# Altium PCB SS_MB_CONV2.0.PcbDoc (part 1 of 4)
Units mil, origin at the board's own origin, x right, y up, seen from the top; angles counter-clockwise.
Board outline 5818.45 x 4760.12 mil, 4 copper layers (Top Layer, Internal Plane 1, Internal Plane 2, Bottom Layer), stack 30.634 mil thick; 381 components, 398 nets, 1514 pads, 801 vias.
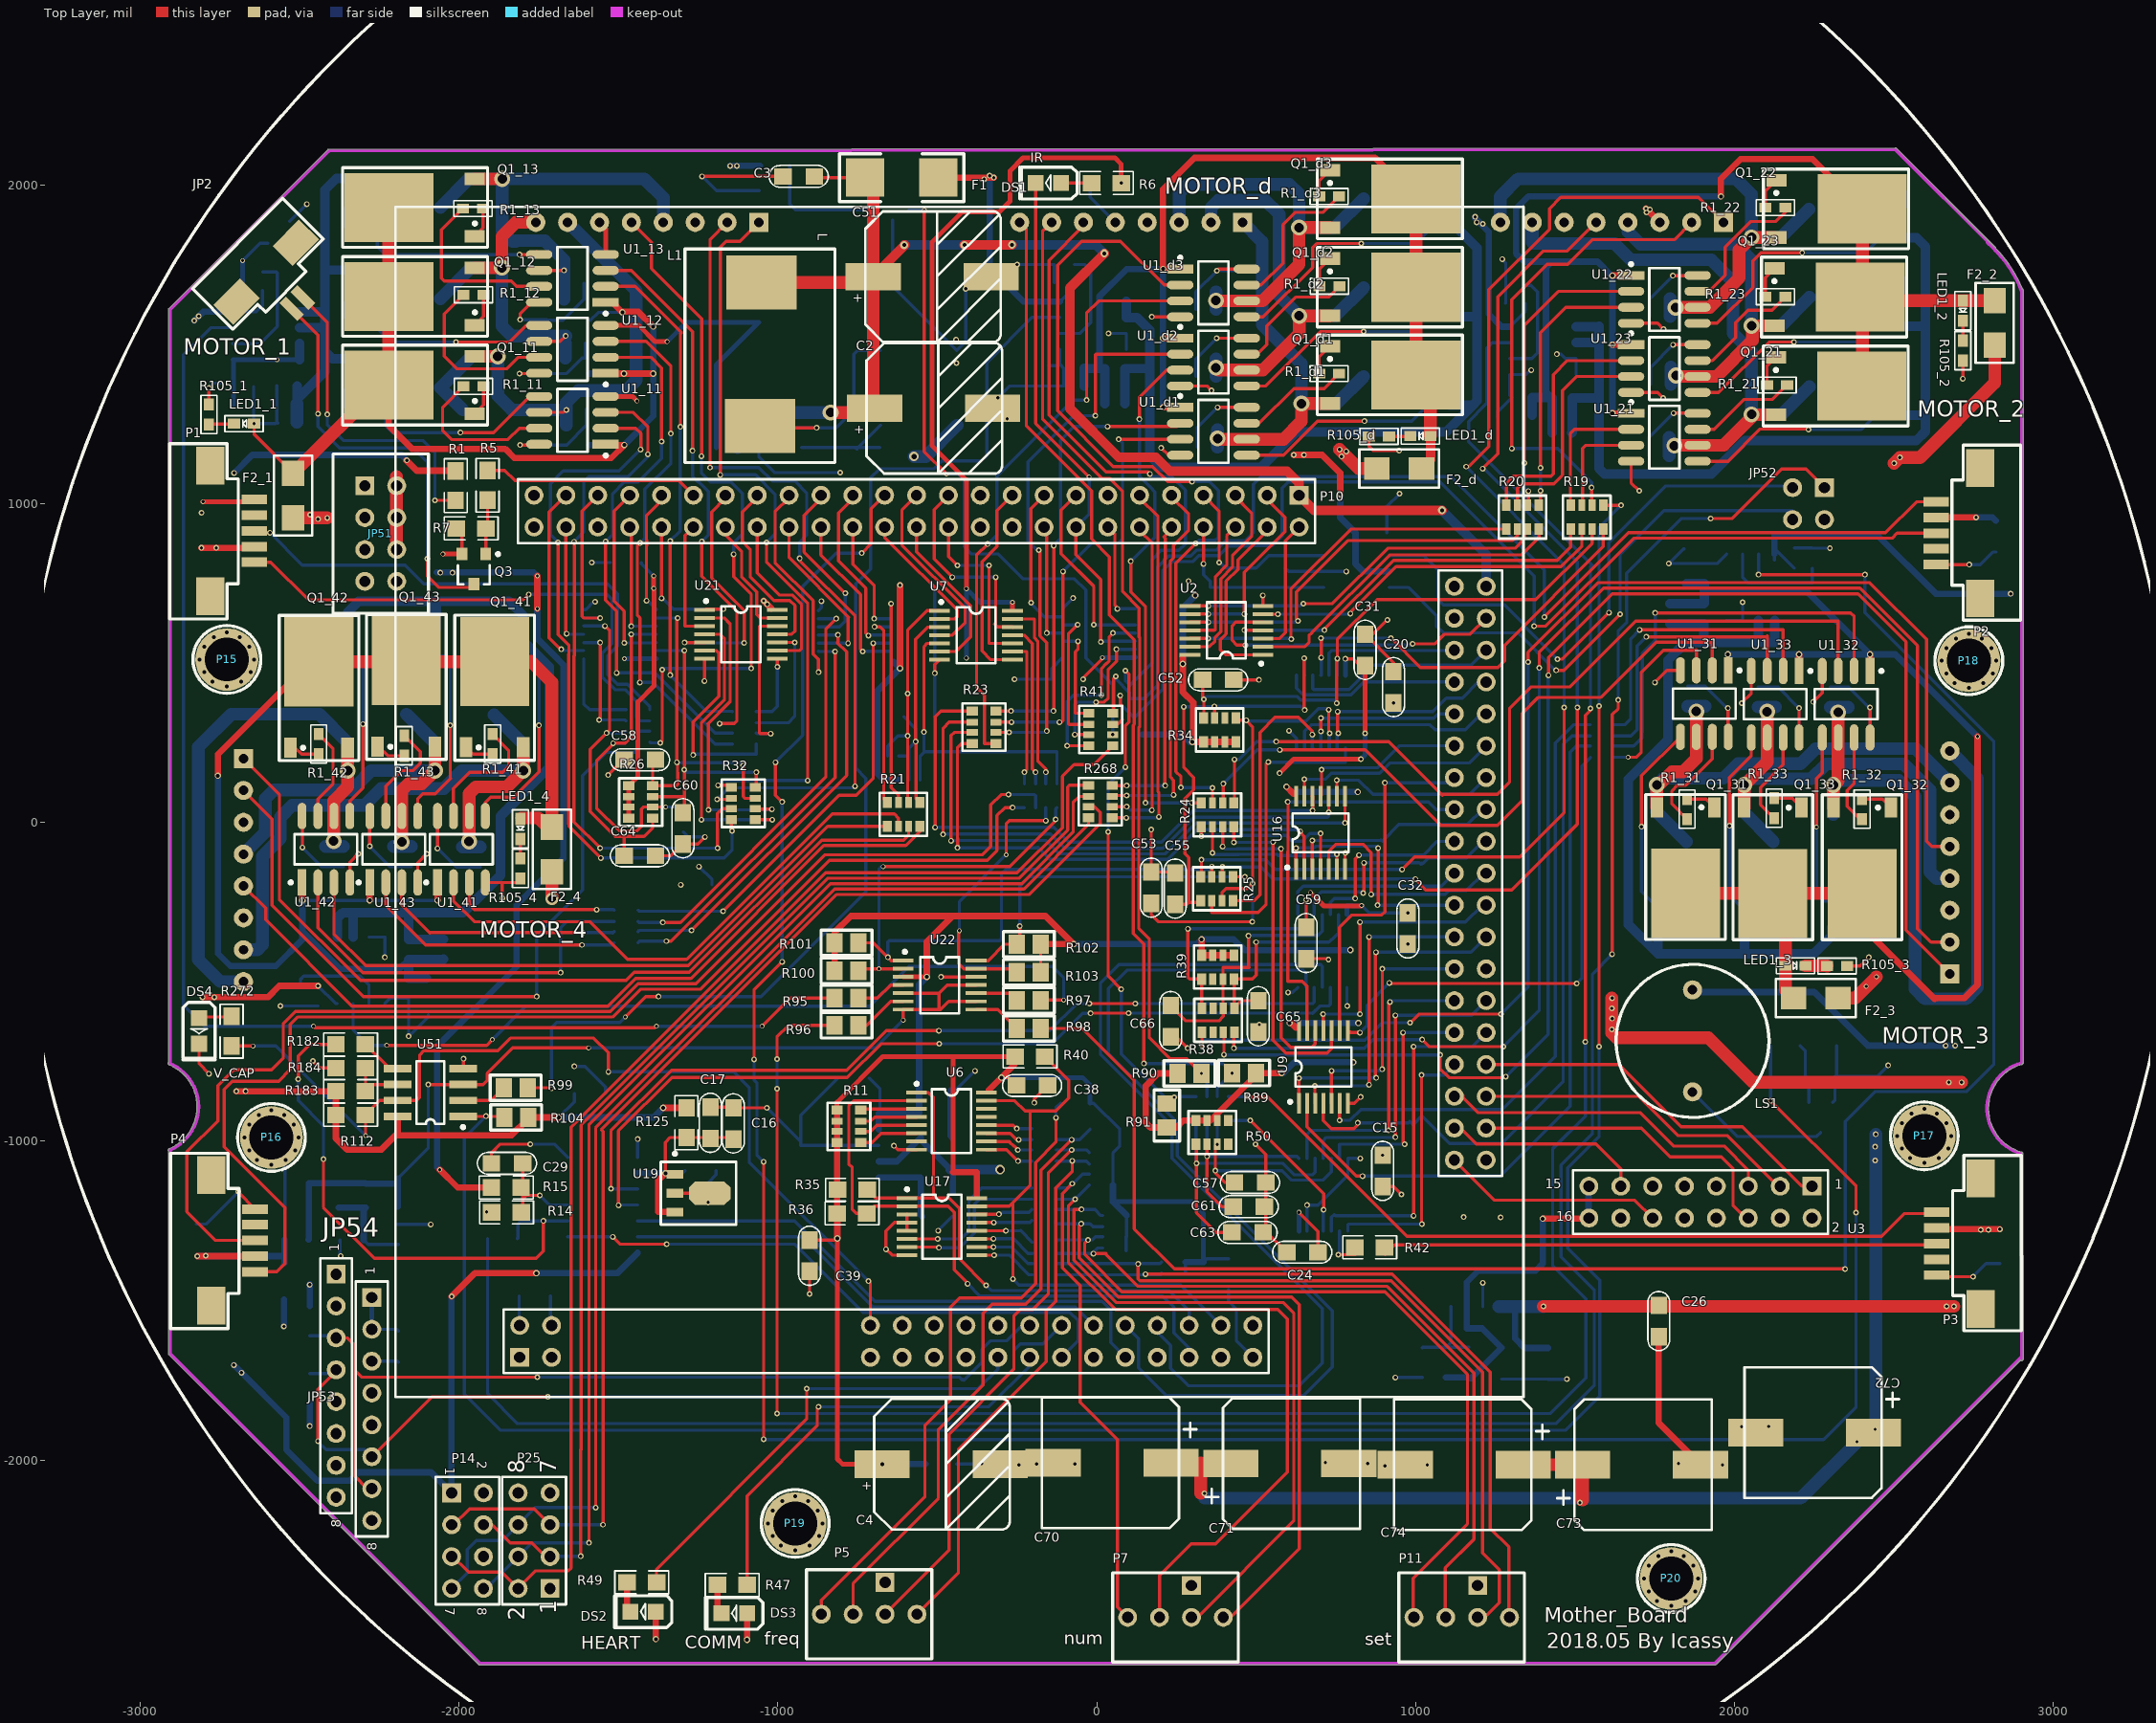
[diagram p0: Top Layer view]
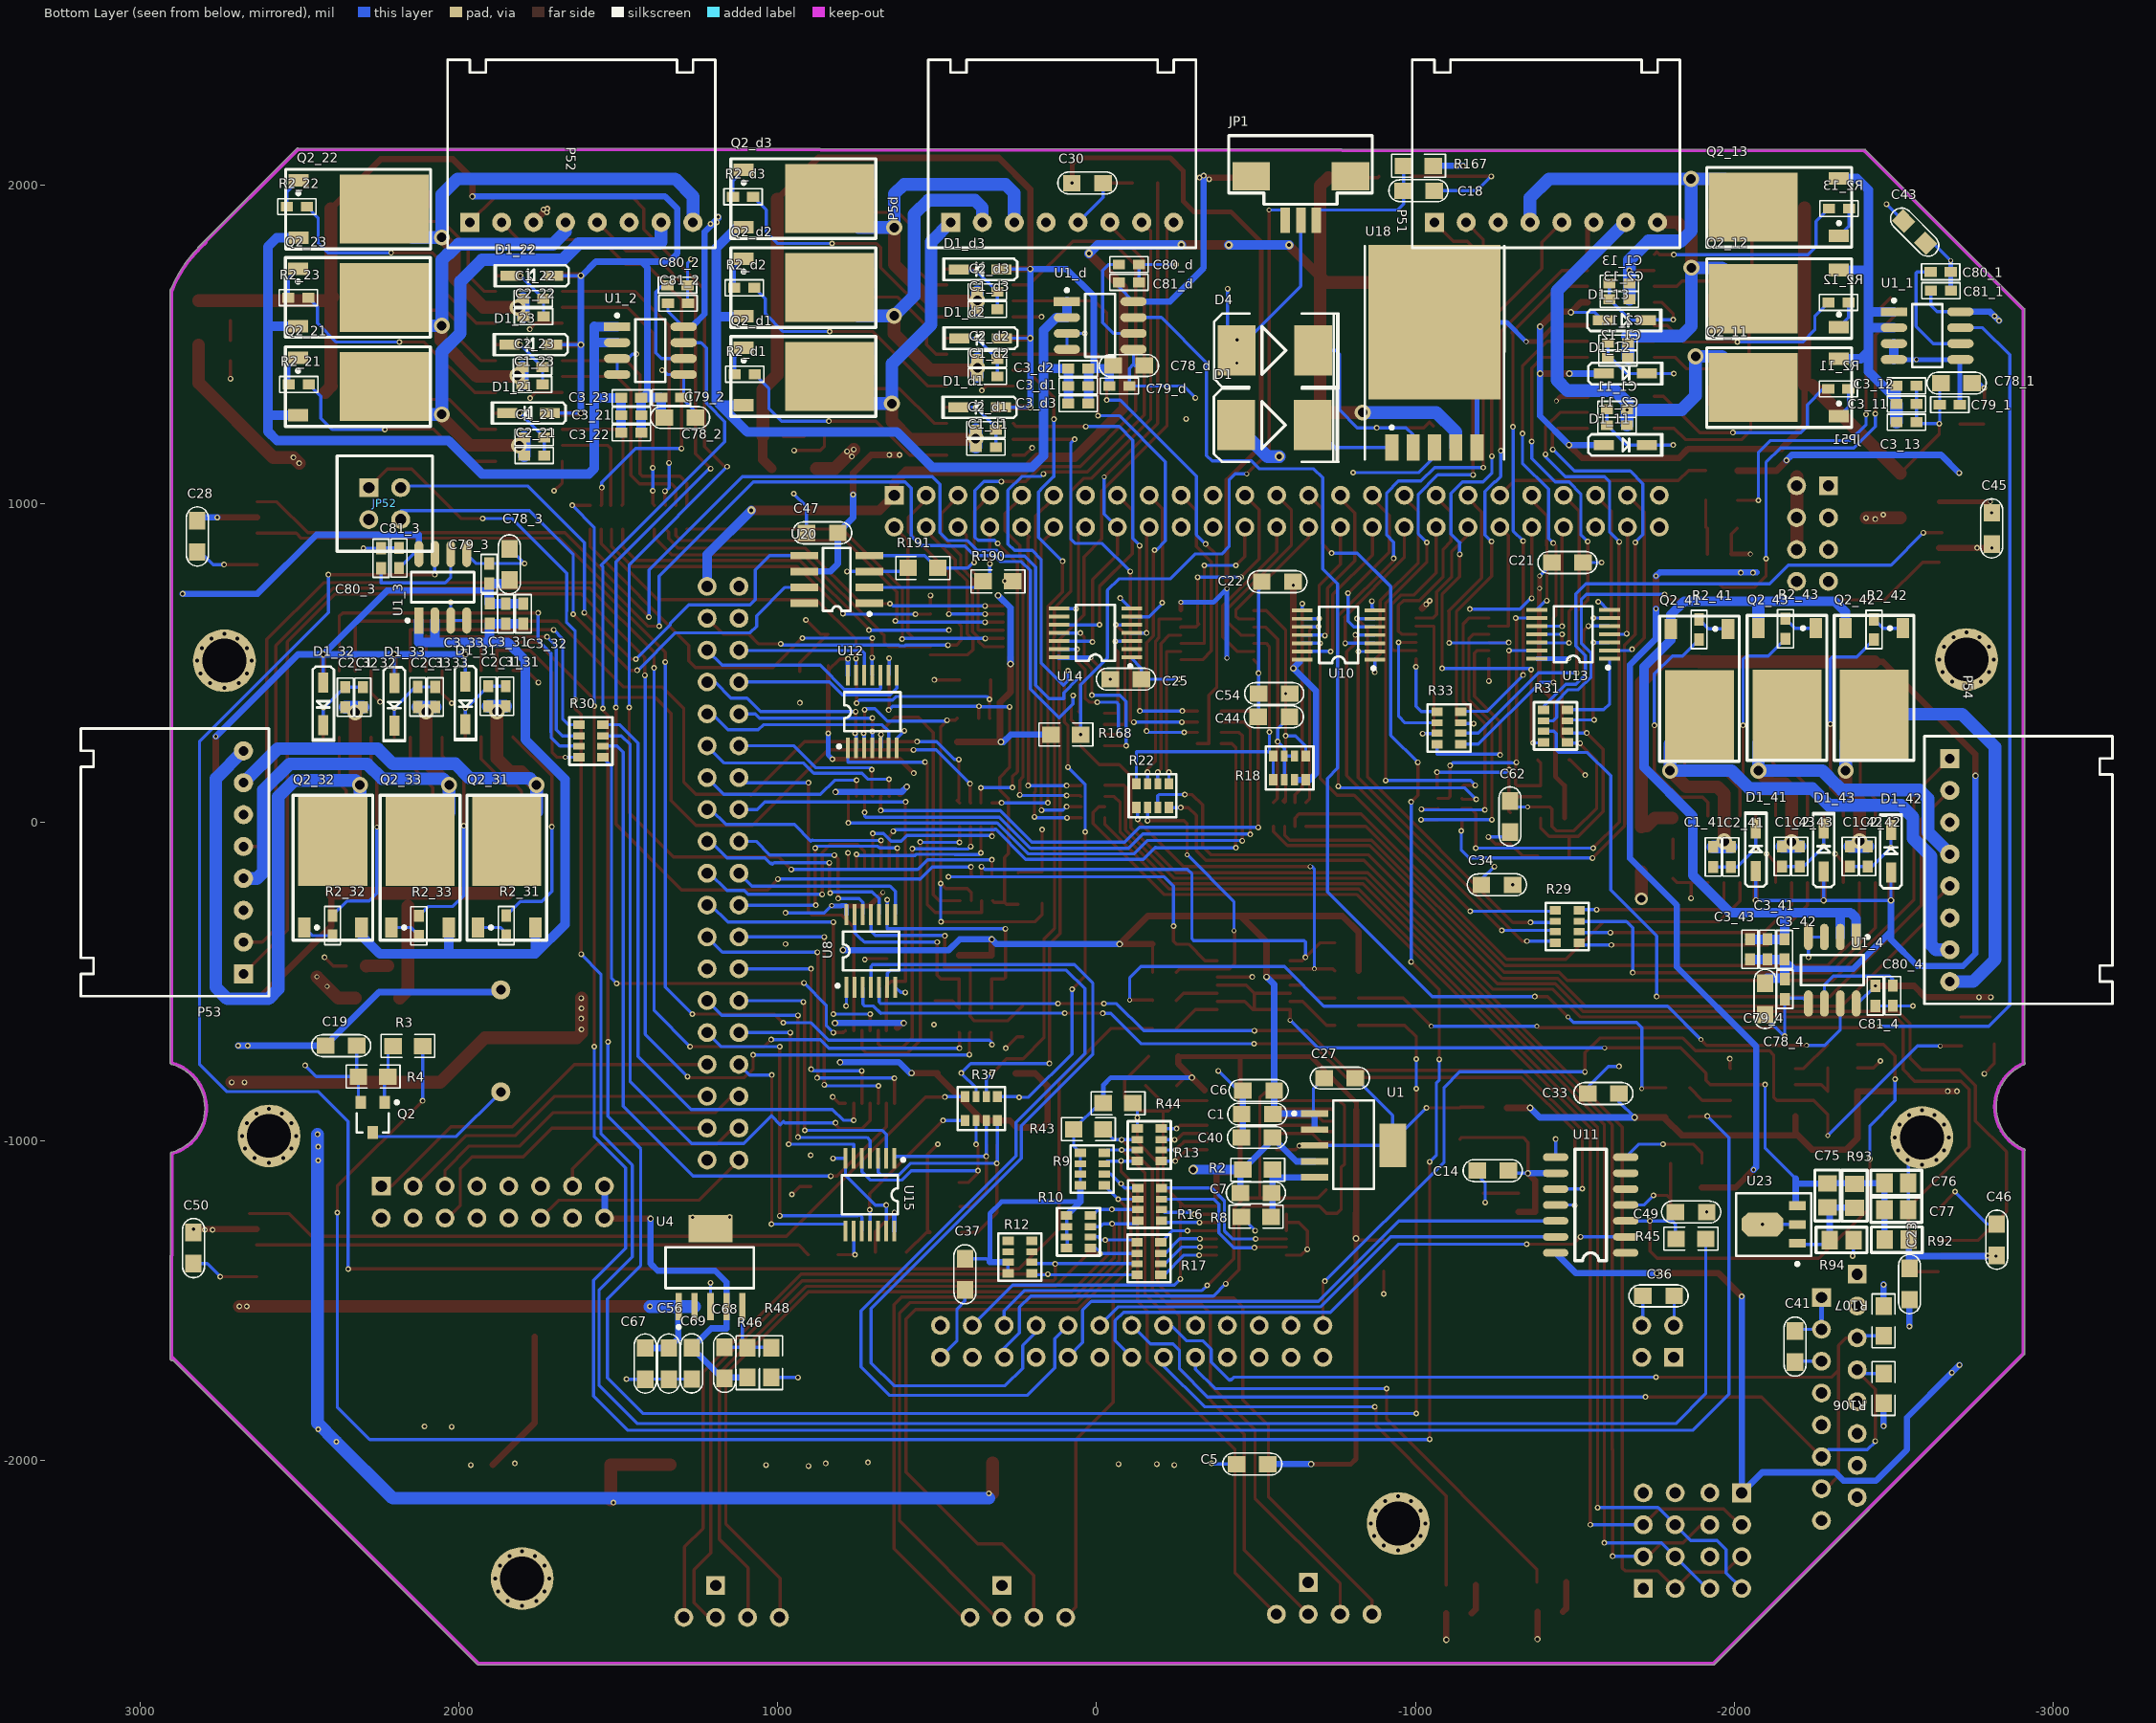
[diagram p1: Bottom Layer view, seen from below]
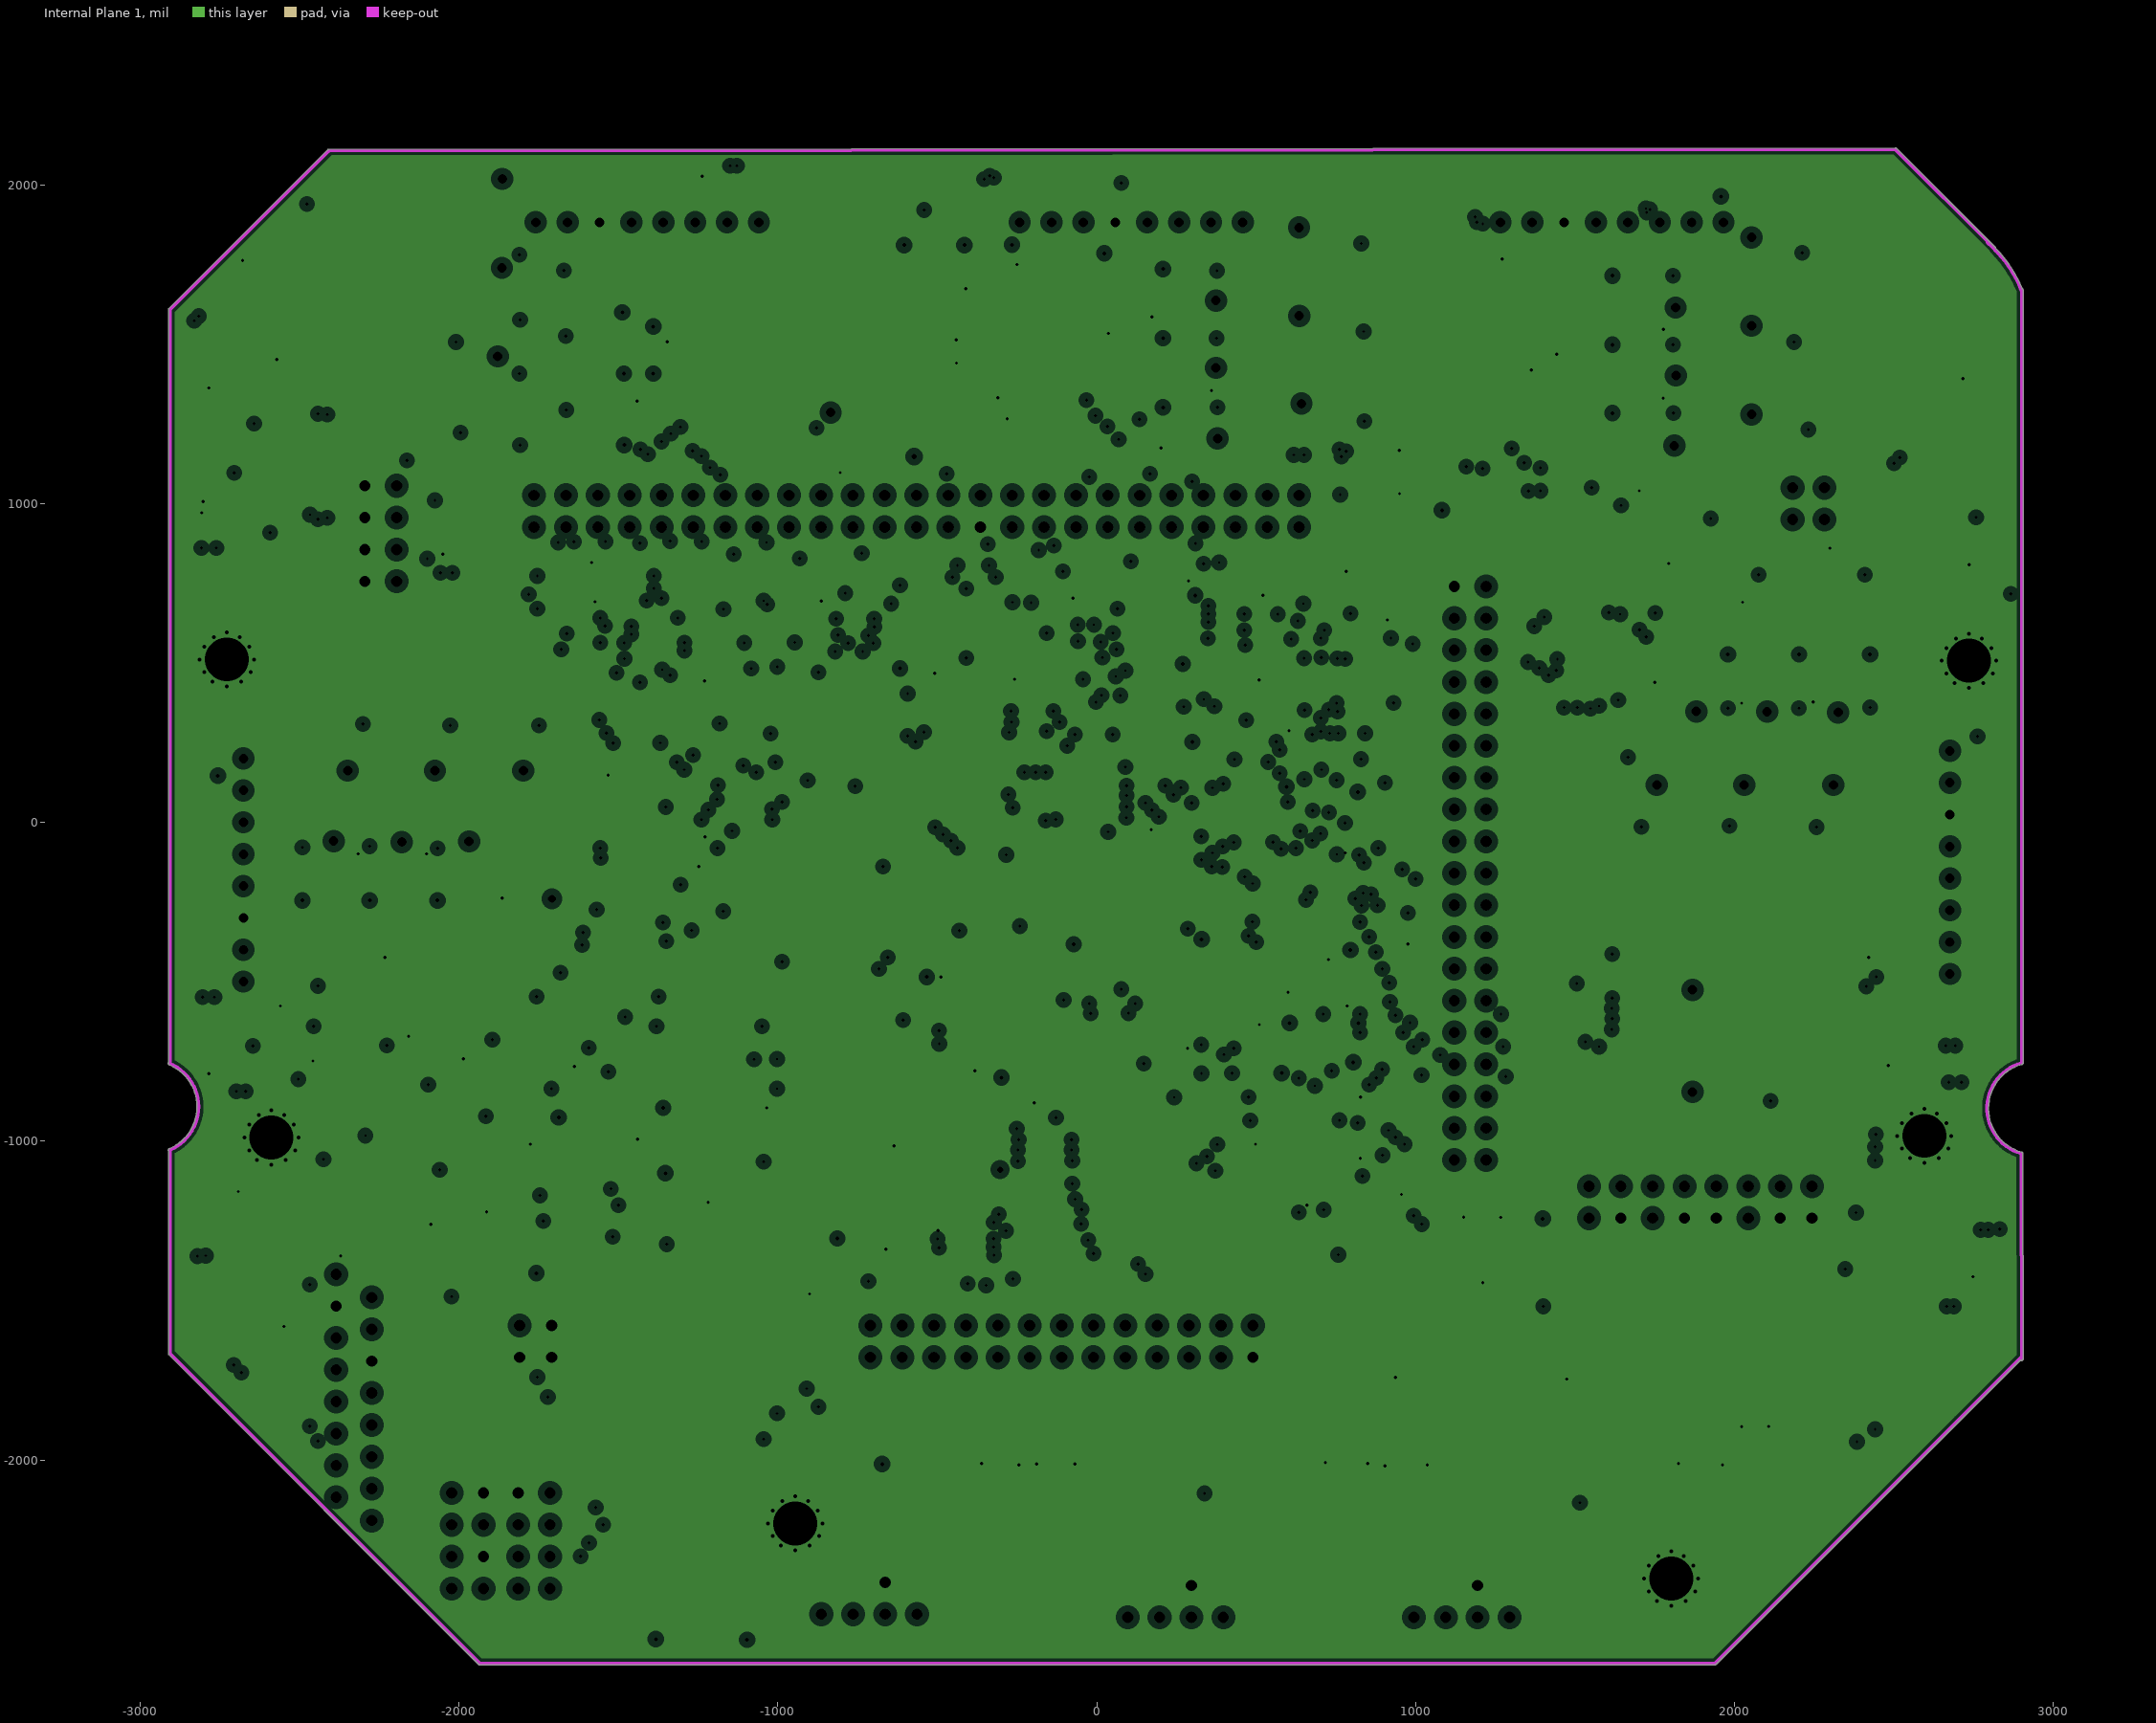
[diagram p2: Internal Plane 1, clearances drawn from the general rule]
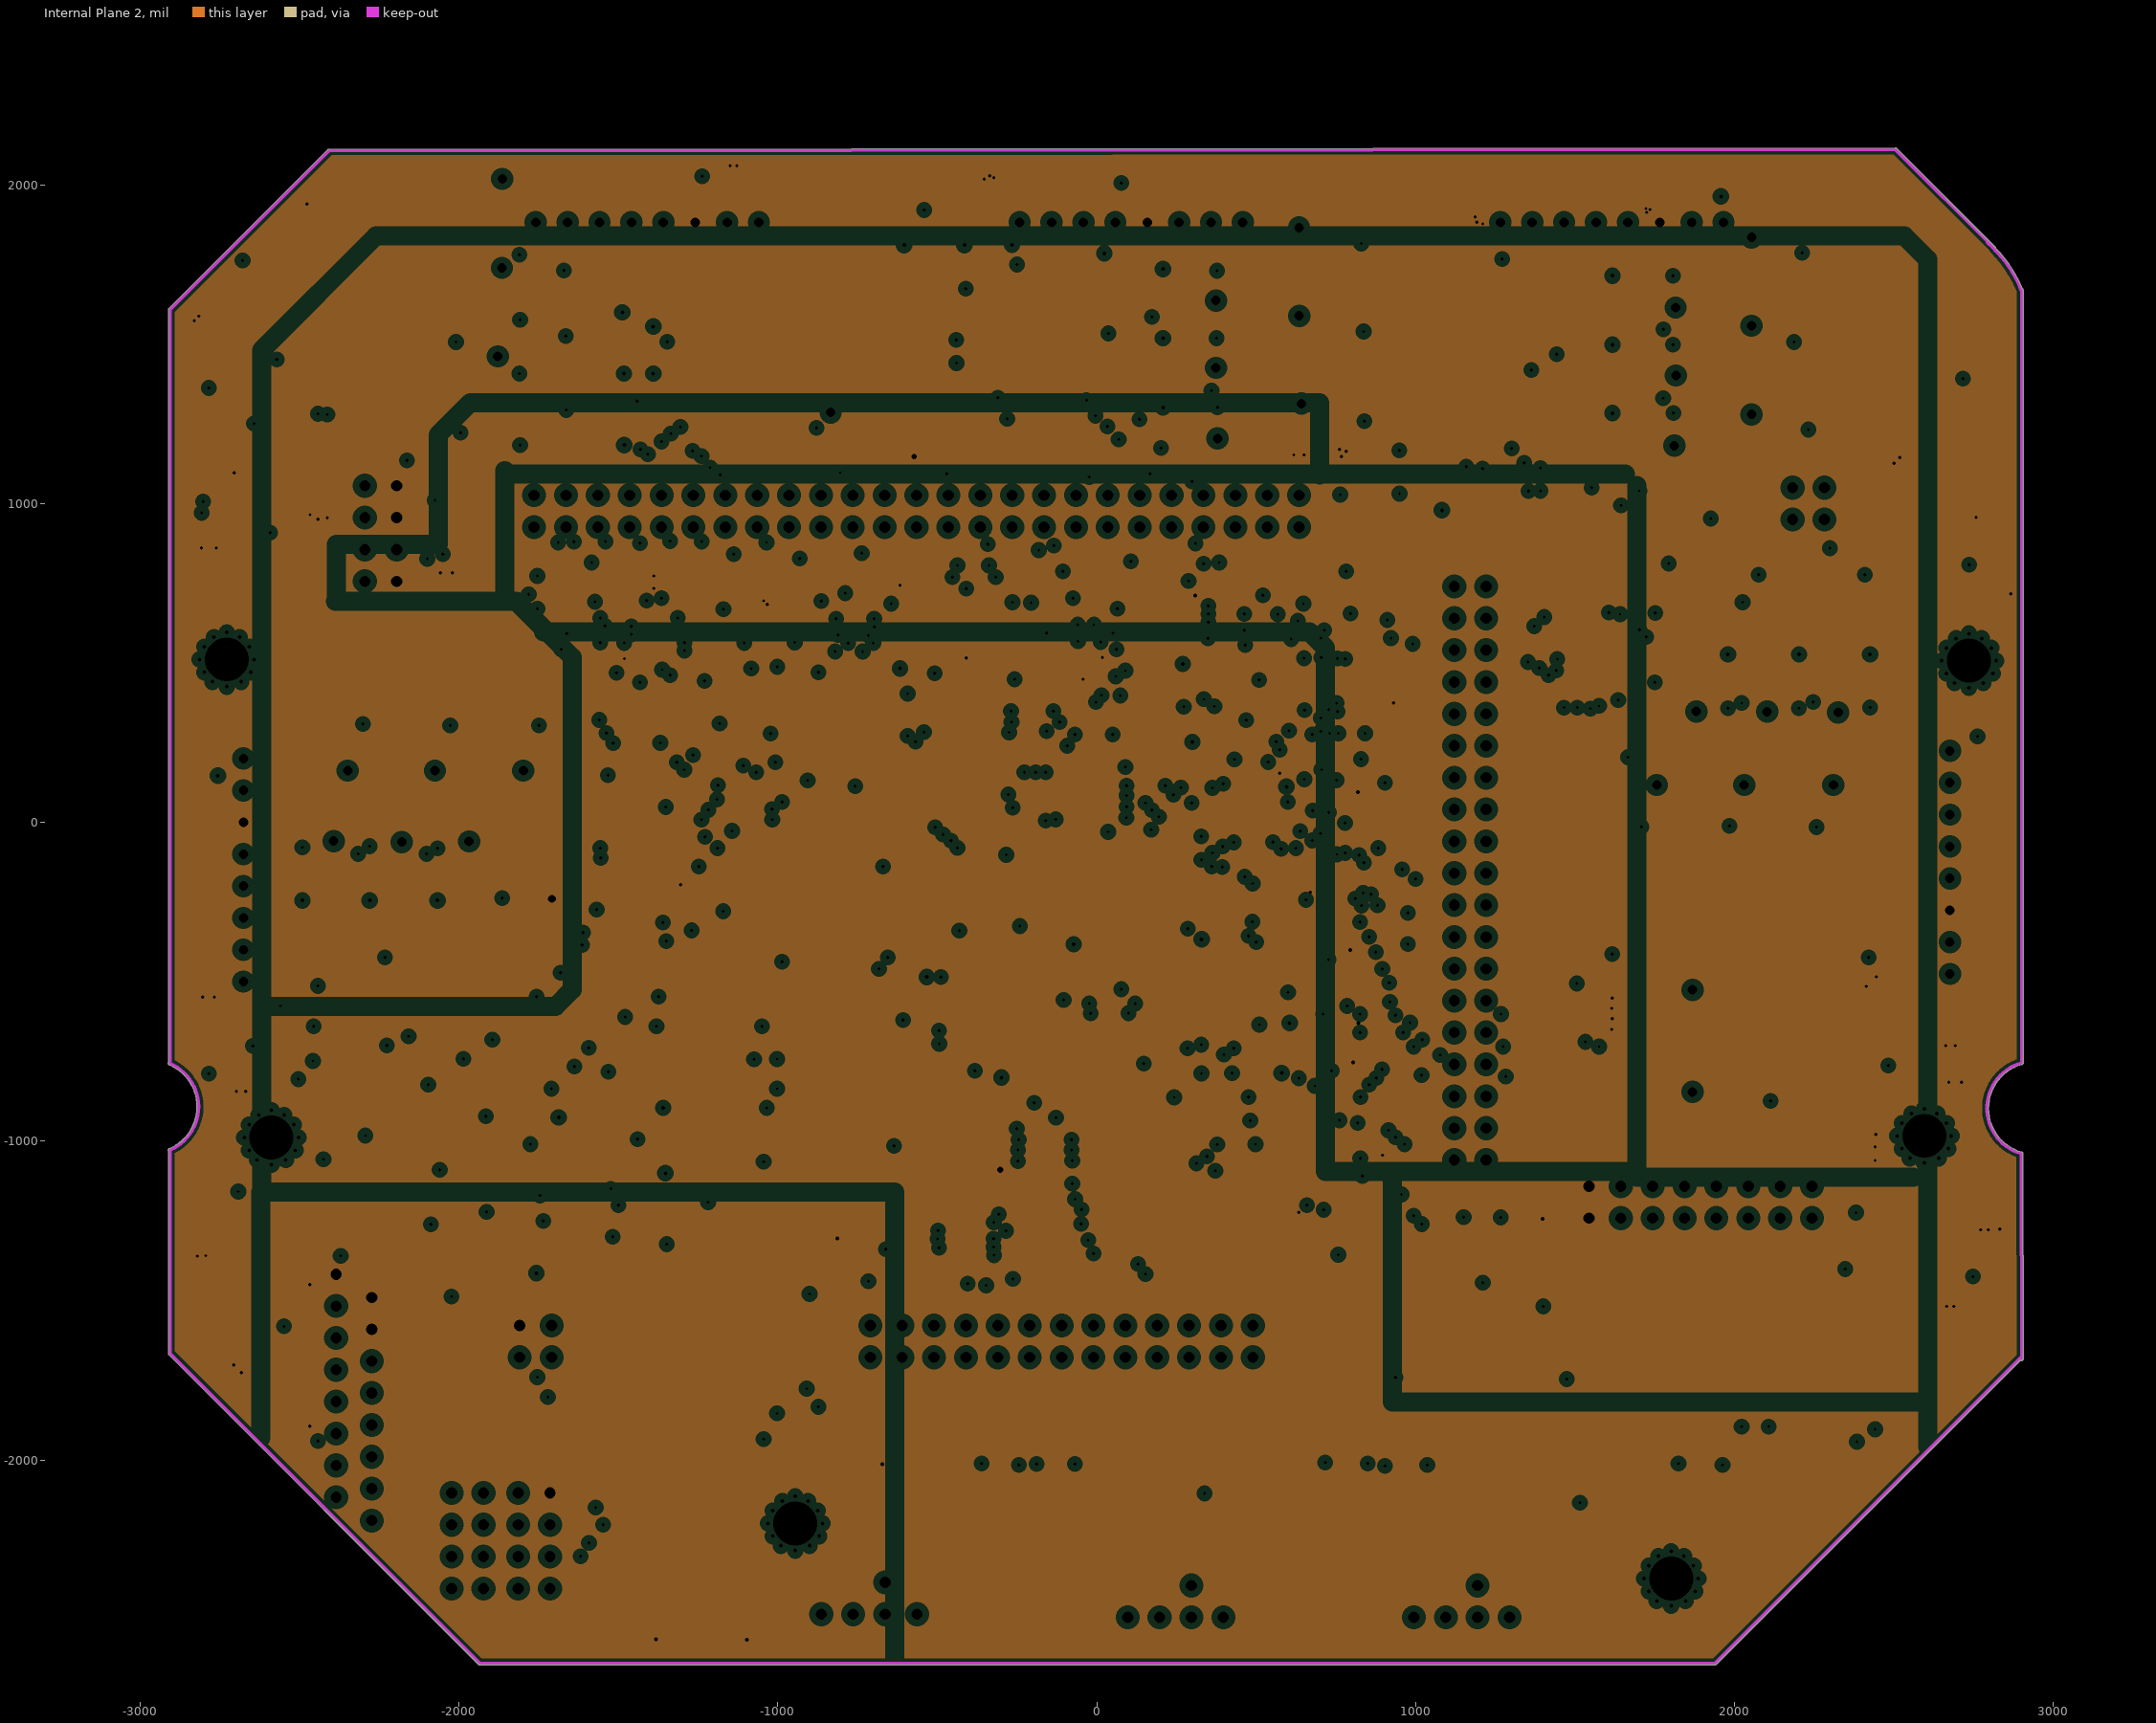
[diagram p3: Internal Plane 2, clearances drawn from the general rule]

## Layer stack, top to bottom
Top Solder: solder mask 0.4, Solder Resist, Dk 3.5
Top Layer: signal copper 1.4
Dielectric1: core 10, FR-4, Dk 4.2
Internal Plane 1: plane copper 1.417, net GND
Dielectric 3: prepreg 5, Dk 4.2
Internal Plane 2: plane copper 1.417, net (Multiple Nets)
Dielectric 2: core 10, Dk 4.2
Bottom Layer: signal copper 1.4
Bottom Solder: solder mask 0.4, Solder Resist, Dk 3.5

## Board outline
-2700.56,-1879.53 ccw(c-2697,-1876) -2700.55,-1879.55 ccw(c-2697,-1876) -2700.53,-1879.56 -2910.55,-1669.55 -1938.55,-2641.55 -1938.56,-2641.53 ccw(c-1935,-2638) -1935,-2643.02 1939,-2643.02 ccw(c1939,-2638) 1942.56,-2641.53 1942.55,-2641.55 2706.55,-1877.55 2706.53,-1877.56 ccw(c2703,-1874) 2706.8,-1877.27 2897.47,-1686.6 ccw(c2900.98,-1683.02) 2906,-1683.02 ccw(c2900.98,-1683.02) 2906,-1683.01 2905.99,-1676.3 ccw(c2900.98,-1676) 2906,-1676 ccw(c2900.98,-1676) 2905.99,-1675.69 2905.14,-1039.03 cw(c2900.12,-1039.04) 2905.14,-1039.04 2905.14,-1039.03 ccw(c2900.12,-1039.04) 2901.48,-1034.21 cw(c2940.24,-896.58) 2901.13,-759.05 ccw(c2900.98,-754.04) 2906,-754.04 2906,1670.3 ccw(c2900.98,1670.3) 2903.99,1674.31 ccw(c2535.25,1523.05) 2819.51,1802.41 ccw(c2814.5,1802.5) 2819.51,1802.5 ccw(c2814.5,1802.5) 2818.05,1806.05 2508.46,2115.64 2508.47,2115.62 ccw(c2504.91,2112.09) 2504.91,2117.1 -2407,2112.9 -2408.61,2112.9 ccw(c-2408.61,2107.88) -2412.17,2111.41 -2412.15,2111.43 -2910.55,1613.03 -2910.53,1613.05 ccw(c-2907,1609.49) -2912.02,1609.49 -2912.02,-753.29 ccw(c-2907.44,-755.35) -2911.36,-758.48 ccw(c-2907,-756) -2906.98,-761.02 cw(c-2965.27,-891.58) -2822.29,-891.58 cw(c-2965.27,-891.58) -2909.4,-1023.2 ccw(c-2907.44,-1027.82) -2912.02,-1029.88 -2912.02,-1666 ccw(c-2907,-1666)

## Design rules (kind name [scope] priority, off if disabled: settings)
Clearance Clearance_1 [InPolygon] p1: gap=15 ignorepadtopadclearanceinfootprint=FALSE except(0: Arc-Hole Track-Hole SMDPad-Hole THPad-Hole Via-Hole Fill-Hole Poly-Hole Region-Hole Text-Hole)
Clearance [All] p2: gap=7 ignorepadtopadclearanceinfootprint=FALSE
ComponentClearance [OnLayer('Keep-Out Layer') vs OnLayer('Keep-Out Layer')] p1: gap=0 collisioncheckmode=3 verticalgap=0 showdistances=FALSE
FabricationTestPointUsage TestPointUsage [All] p1: valid=0 allowmultiple=FALSE
FabricationTestpoint Testpoint [All] p1: side=3 testpointundercomponent=TRUE minsize=25 maxsize=100 preferedsize=60 minholesize=0 maxholesize=40 preferedholesize=32 testpointgrid=1 allowsidetop=TRUE allowsidebottom=TRUE usegrid=TRUE gridtolerance=0.01
HoleSize [All] p1: absolutevalues=TRUE maxlimit=200 minlimit=10 maxpercent=80.000 minpercent=20.000
HoleToHoleClearance [All] p1: gap=0 allowstackedmicrovias=TRUE
MinimumSolderMaskSliver [All] p1: minsoldermaskwidth=1
PlaneClearance [All] p1: clearance=20
PlaneConnect [All] p1: planeconnectstyle=Direct reliefexpansion=20 reliefentries=4 reliefconductorwidth=10 reliefairgap=10
PolygonConnect [All] p1: connectstyle=Direct reliefconductorwidth=10 reliefentries=4 polygonreliefangle="45 Angle" airgapwidth=10
RoomDefinition SS_MB_CONV1.1 [InComponentClass('SS_MB_CONV1.1')] p1 off: confinementstyle=ConfineIn formatcopy=TRUE lockcomponents=FALSE outline -10144,-8633 -8144,-8633 -8144,-7633 -10144,-7633
RoutingVias [All] p1: holewidth=10 width=18 viastyle="Through Hole" minholewidth=10 minwidth=18 maxholewidth=50 maxwidth=100
SilkToSilkClearance [All] p1: silktosilkclearance=0
SilkToSolderMaskClearance SilkscreenOverComponentPads [IsPad] p1: minsilkscreentomaskgap=0 clearancetoexposedcopper=TRUE
SolderMaskExpansion [All] p1: expansion=4
Width [All] p1: maxlimit=600 minlimit=10 preferedwidth=10
20 further rules are at their usual default settings.

## Components (designator, comment, footprint, x,y, rotation, side; value= is the part's Value field where it differs from the comment)
C1 "1uF" 0805C -549,-915 r0 bottom
C1_11 "0.1uF" 0603 -1632.5,1297 r180 bottom
C1_12 "0.1uF" 0603 -1635.5,1458 r180 bottom
C1_13 "0.1uF" 0603 -1640,1692 r180 bottom
C1_21 "0.1uF" 0603 1764.66,1208.5 r0 bottom
C1_22 "0.1uF" 0603 1767,1644 r0 bottom
C1_23 "0.1uF" 0603 1769.5,1374.7 r0 bottom
C1_31 "0.1uF" 0603 1853.7,396.44 r270 bottom
C1_32 "0.1uF" 0603 2301.7,393.44 r270 bottom
C1_33 "0.1uF" 0603 2074.7,394.44 r270 bottom
C1_41 "0.1uF" 0603 -1934.7,-107.5 r90 bottom
C1_42 "0.1uF" 0603 -2363.7,-106.5 r90 bottom
C1_43 "0.1uF" 0603 -2150.7,-106.5 r90 bottom
C1_d1 "0.1uF" 0603 347.5,1178 r0 bottom
C1_d2 "0.1uF" 0603 342.5,1399.7 r0 bottom
C1_d3 "0.1uF" 0603 342.5,1610.7 r0 bottom
C2 "470uF" J10 -697,1300 r0 top
C2_11 "1uF" 0603 -1632.5,1247 r180 bottom
C2_12 "1uF" 0603 -1635.5,1505 r180 bottom
C2_13 "1uF" 0603 -1640,1642 r180 bottom
C2_21 "1uF" 0603 1764,1152 r0 bottom
C2_22 "1uF" 0603 1766.5,1588 r0 bottom
C2_23 "1uF" 0603 1769.5,1429.7 r0 bottom
C2_31 "1uF" 0603 1908.7,396.44 r270 bottom
C2_32 "1uF" 0603 2356.7,393.44 r270 bottom
C2_33 "1uF" 0603 2129.7,394.44 r270 bottom
C2_41 "1uF" 0603 -1989.7,-107.5 r90 bottom
C2_42 "1uF" 0603 -2418.7,-106.5 r90 bottom
C2_43 "1uF" 0603 -2205.7,-106.5 r90 bottom
C2_d1 "1uF" 0603 347.5,1233 r0 bottom
C2_d2 "1uF" 0603 342.5,1454.7 r0 bottom
C2_d3 "1uF" 0603 342.5,1665.7 r0 bottom
C3 "0.1uF" 0805C -980,2028 r0 top
C3_11 "0.22uF" 0603 -2540.5,1313.5 r180 bottom
C3_12 "0.22uF" 0603 -2540.5,1370.5 r180 bottom
C3_13 "0.22uF" 0603 -2540.5,1256.5 r180 bottom
C3_21 "0.22uF" 0603 1459.5,1278.37 r180 bottom
C3_22 "0.22uF" 0603 1459.5,1223.37 r180 bottom
C3_23 "0.22uF" 0603 1460,1333 r180 bottom
C3_31 "0.22uF" 0603 1853.37,655.44 r90 bottom
C3_32 "0.22uF" 0603 1798.37,655.44 r90 bottom
C3_33 "0.22uF" 0603 1904,655.94 r90 bottom
C3_41 "0.22uF" 0603 -2104.5,-397.5 r270 bottom
C3_42 "0.22uF" 0603 -2158,-398 r270 bottom
C3_43 "0.22uF" 0603 -2049.5,-397.5 r270 bottom
C3_d1 "0.22uF" 0603 57.5,1369.7 r180 bottom
C3_d2 "0.22uF" 0603 57.5,1424.7 r180 bottom
C3_d3 "0.22uF" 0603 57.5,1314.7 r180 bottom
C4 "470uF" J10 -673,-2013 r0 top
C5 "0.1uF" 0805C -533,-2013 r0 bottom
C6 "0.1uF" 0805C -553,-841 r0 bottom
C7 "15pF" 0805C -455,-1162 r180 bottom
C14 "0.1uF" 0805C -1198,-1092 r180 bottom
C15 "0.1uF" 0805C 896.91,-1137.72 r90 top
C16 "1uF" 0805C -1140,-899 r270 top
C17 "0.1uF" 0805C -1212,-897 r270 top
C18 "4.7uF" 0805C -965,1983 r180 bottom
C19 "0.1uF" 0805C 2325,-700 r0 bottom
C20 "0.1uF" 0805C 931,470 r270 top
C21 "0.1uF" 0805C -1522,816 r0 bottom
C22 "0.1uF" 0805C -522,756 r180 bottom
C23 "0.1uF" 0805C -2550,-1493 r90 bottom
C24 "0.1uF" 0805C 600,-1348 r0 top
C25 "0.1uF" 0805C -137,450 r0 bottom
C26 "0.1uF" 0805C 1763,-1609 r90 top
C27 "0.1uF" 0805C -808,-802 r0 bottom
C28 "0.1uF" 0805C 2821,853 r90 bottom
C29 "0.1uF" 0805C -1895,-1069 r0 top
C30 "0.1uF" 0805C -16,2006.96 r0 bottom
C31 "0.1uF" 0805C 842,587 r270 top
C32 "0.1uF" 0805C 976,-377 r90 top
C33 "0.1uF" 0805C -1545,-850 r180 bottom
C34 "0.1uF" 0805C -1211,-195 r180 bottom
C36 "0.1uF" 0805C -1718,-1485 r180 bottom
C37 "0.1uF" 0805C 413.17,-1462.19 r90 bottom
C38 "0.1uF" 0805C -158,-825 r180 top
C39 "0.1uF" 0805C -901,-1404 r90 top
C40 "2.2uF" 0805C -548,-988 r0 bottom
C41 "0.1uF" 0805C -2191,-1689 r90 bottom
C43 "0.1uF" 0805C -2598,1821 r45 bottom
C44 "0.01uF" 0805C -601,332 r0 bottom
C45 "0.1uF" 0805C -2808,968 r270 bottom
C46 "0.1uF" 0805C -2824,-1264 r270 bottom
C47 "0.1uF" 0805C 816,909 r0 bottom
C49 "0.1uF" 0805C -1910,-1222 r0 bottom
C50 "0.1uF" 0805C 2833.06,-1380 r90 bottom
C51 "470uF" J10 -701,1713 r0 top
C52 "0.01uF" 0805C 336,448 r0 top
C53 "0.01uF" 0805C 171,-249 r90 top
C54 "0.01uF" 0805C -602,405 r0 bottom
C55 "0.01uF" 0805C 246,-252 r90 top
C56 "1uF" 0805C 1342.18,-1652.5 r270 bottom
C57 "0.01uF" 0805C 436,-1129.28 r0 top
C58 "0.01uF" 0805C -1388,197 r180 top
C59 "0.01uF" 0805C 657,-333 r270 top
C60 "0.01uF" 0805C -1298,27.13 r270 top
C61 "0.01uF" 0805C 432,-1205 r0 top
C62 "0.01uF" 0805C -1297,64 r270 bottom
C63 "0.01uF" 0805C 428,-1286 r0 top
C64 "0.01uF" 0805C -1478,-104 r0 top
C65 "0.01uF" 0805C 507,-562.85 r270 top
C66 "0.01uF" 0805C 232,-578 r270 top
C67 "0.1uF" 0805C 1415.98,-1652.5 r270 bottom
C68 "15pF" 0805C 1167,-1740 r90 bottom
C69 "2.2uF" 0805C 1270,-1652 r270 bottom
C70 "470uF" "Cap - duplicate1" 233,-2009 r90 top
C71 "470uF" "Cap - duplicate1" 421,-2011 r270 top
C72 "470uF" "Cap - duplicate1" 2437,-1914 r90 top
C73 "470uF" "Cap - duplicate1" 1524,-2015 r270 top
C74 "470uF" "Cap - duplicate1" 1338,-2015 r90 top
C75 "0.1uF" 0805 -2293,-1170 r90 bottom
C76 "1uF" 0805 -2509,-1131 r0 bottom
C77 "0.1uF" 0805 -2509,-1215 r0 bottom
C78_1 "10uF" 0805C -2742.67,1379 r0 bottom
C78_2 "10uF" 0805C 1262,1271 r0 bottom
C78_3 "10uF" 0805C 1842,855 r270 bottom
C78_4 "10uF" 0805C -2097,-598.28 r90 bottom
C78_d "10uF" 0805C -146,1434 r0 bottom
C79_1 "0.1uF" 0603 -2676.5,1311.5 r0 bottom
C79_2 "0.1uF" 0603 1334,1333.66 r0 bottom
C79_3 "0.1uF" 0603 1905.63,781.44 r270 bottom
C79_4 "0.1uF" 0603 -2159,-523 r90 bottom
C79_d "0.1uF" 0603 -71.5,1370 r0 bottom
C80_1 "1nF" 0603 -2648,1728 r0 bottom
C80_2 "1nF" 0603 1314.5,1686 r0 bottom
C80_3 "1nF" 0603 2245,829.44 r270 bottom
C80_4 "1nF" 0603 -2497.9,-543.5 r90 bottom
C80_d "1nF" 0603 -101.5,1751 r0 bottom
C81_1 "0.1uF" 0603 -2649,1669 r0 bottom
C81_2 "0.1uF" 0603 1313.34,1629.64 r0 bottom
C81_3 "0.1uF" 0603 2188,830.44 r270 bottom
C81_4 "0.1uF" 0603 -2443.04,-544 r90 bottom
C81_d "0.1uF" 0603 -101.5,1695 r0 bottom
D1 "SS36" SMC -438,1247.08 r180 bottom
D1_11 "1N5819" "SOD-123 - duplicate" -1592,1185 r180 bottom
D1_12 "1N5819" "SOD-123 - duplicate" -1592,1409 r180 bottom
D1_13 "1N5819" "SOD-123 - duplicate" -1589,1576 r180 bottom
D1_21 "1N5819" "SOD-123 - duplicate" 1715,1285 r0 bottom
D1_22 "1N5819" "SOD-123 - duplicate" 1705.14,1716 r0 bottom
D1_23 "1N5819" "SOD-123 - duplicate" 1708.14,1499.7 r0 bottom
D1_31 "1N5819" "SOD-123 - duplicate" 1980,441.94 r270 bottom
D1_32 "1N5819" "SOD-123 - duplicate" 2426,439.94 r270 bottom
D1_33 "1N5819" "SOD-123 - duplicate" 2203,437.94 r270 bottom
D1_41 "1N5819" "SOD-123 - duplicate" -2068,-152 r90 bottom
D1_42 "1N5819" "SOD-123 - duplicate" -2492,-157 r90 bottom
D1_43 "1N5819" "SOD-123 - duplicate" -2281,-153 r90 bottom
D1_d1 "1N5819" "SOD-123 - duplicate" 300.14,1303 r0 bottom
D1_d2 "1N5819" "SOD-123 - duplicate" 297.14,1519.96 r0 bottom
D1_d3 "1N5819" "SOD-123 - duplicate" 298.14,1736 r0 bottom
D4 "SS36" SMC -439,1482.08 r180 bottom
DS1 "LED2" 0805D -111.73,2006.96 r180 top
DS2 "LED1" 0805D -1382.93,-2476 r180 top
DS3 "LED2" 0805D -1096.93,-2481 r180 top
DS4 "LED2" 0805D -2816,-614 r270 top
F1 "3A" 2512r -727,2024 r0 top
F2_1 "FUSE" FUSE -2521,956 r180 top
F2_2 "FUSE" FUSE 2817,1498 r180 top
F2_3 "FUSE" FUSE 2326,-551.06 r270 top
F2_4 "FUSE" FUSE -1708.73,-153.9 r180 top
F2_d "FUSE" FUSE 879,1111 r90 top
JP1 "Header 3" SMD-3P-1.25 -689.72,1890.2 r0 bottom
JP2 "Header 2" SMD-2P-1.25 -2490.6,1647.53 r225 top locked
JP51 "Header 4X2" 2*4_2.5mm -2296,1057 r270 top locked
JP52 "Header 2X2" 2*2_2.5mm 2283,1051 r270 bottom locked
JP53 "HEADER1*8" HDR1X8 -2274,-1490 r270 top
JP54 "HEADER1*8" HDR1X8 -2386,-1417 r270 top
L1 "Inductor" L -1129,1435 r90 top value=100uH
LED1_1 "led" 0603_diode -2675,1252 r180 top
LED1_2 "led" 0603_diode 2717,1606 r270 top
LED1_3 "led" 0603_diode 2192,-449.06 r0 top
LED1_4 "led" 0603_diode -1807.73,-19.9 r270 top
LED1_d "led" 0603_diode 1015.5,1213 r180 top
LS1 "Buzzer" Buzzer 1869,-525 r270 top
P1 "Header 5" SMD-5P-1.25 -2643,1013.85 r270 top
P2 "Header 5" SMD-5P-1.25 2633,809.79 r90 top
P3 "Header 5" SMD-5P-1.25 2635.2,-1419.7 r90 top
P4 "Header 5" SMD-5P-1.25 -2640.57,-1212.57 r270 top
P5 "COAX-M" A6RV-161RS -664,-2384 r0 top
P5d "Header_8P" Header_8P 458.27,1883.58 r270 bottom locked
P7 "COAX-M" A6RV-161RS 297,-2394 r0 top
P10 "CONNECTOR_FPGA" CONNECTOR_FPGA 634.81,1027.15 r0 top locked
P11 "COAX-M" A6RV-161RS 1195,-2394 r0 top
P14 "Header 4X2" HDR2X4 -2023.83,-2103.22 r270 top
P15 "安装孔" 安装孔-3.5-5 -2729,512 r0 top locked
P16 "安装孔" 安装孔-3.5-5 -2589,-988 r0 top locked
P17 "安装孔" 安装孔-3.5-5 2596,-983 r0 top locked
P18 "安装孔" 安装孔-3.5-5 2736,508 r0 top
P19 "安装孔" 安装孔-3.5-5 -946,-2199 r0 top
P20 "安装孔" 安装孔-3.5-5 1802,-2372 r0 top
P25 "Header 4X2" HDR2X4 -1715,-2403.22 r90 top
P51 "Header_8P" Header_8P -1059.73,1883.58 r270 bottom locked
P52 "Header_8P" Header_8P 1966.27,1883.58 r270 bottom locked
P53 "Header_8P" Header_8P 2676.38,-475.01 r180 bottom locked
P54 "Header_8P" Header_8P -2676.84,200.99 r0 bottom locked
Q1_11 "IRFRU1205" TO-252 -2365.84,1498 r180 top
Q1_12 "IRFRU1205" TO-252 -2365.84,1775.96 r180 top
Q1_13 "IRFRU1205" TO-252 -2365.84,2054.96 r180 top
Q1_21 "IRFRU1205" TO-252 2545.61,1245.04 r0 top
Q1_22 "IRFRU1205" TO-252 2546.84,1800.96 r0 top
Q1_23 "IRFRU1205" TO-252 2540.84,1524.04 r0 top
Q1_31 "IRFRU1205" TO-252 1722.04,-366.9 r270 top
Q1_32 "IRFRU1205" TO-252 2275.96,-367.74 r270 top
Q1_33 "IRFRU1205" TO-252 1996.04,-367.9 r270 top
Q1_41 "IRFRU1205" TO-252 -1764.04,650.84 r90 top
Q1_42 "IRFRU1205" TO-252 -2314.96,649.84 r90 top
Q1_43 "IRFRU1205" TO-252 -2041,653 r90 top
Q1_d1 "IRFRU1205" TO-252 1146.84,1279.96 r0 top
Q1_d2 "IRFRU1205" TO-252 1146.84,1554.96 r0 top
Q1_d3 "IRFRU1205" TO-252 1146.84,1832.04 r0 top
Q2 "9013" SO-G3/Y1 2286,-905 r0 bottom
Q2_11 "IRFRU1205" TO-252 -1914,1490.04 r0 bottom
Q2_12 "IRFRU1205" TO-252 -1914,1768.96 r0 bottom
Q2_13 "IRFRU1205" TO-252 -1914,2056 r0 bottom
Q2_21 "IRFRU1205" TO-252 2090.16,1243.04 r180 bottom
Q2_22 "IRFRU1205" TO-252 2089.16,1799.96 r180 bottom
Q2_23 "IRFRU1205" TO-252 2090.16,1522.96 r180 bottom
Q2_31 "IRFRU1205" TO-252 1725.04,85.79 r90 bottom
Q2_32 "IRFRU1205" TO-252 2270.96,85.79 r90 bottom
Q2_33 "IRFRU1205" TO-252 1997.12,85.79 r90 bottom
Q2_41 "IRFRU1205" TO-252 -1766,192.84 r270 bottom
Q2_42 "IRFRU1205" TO-252 -2314,195 r270 bottom
Q2_43 "IRFRU1205" TO-252 -2041,195 r270 bottom
Q2_d1 "IRFRU1205" TO-252 692.16,1274.96 r180 bottom
Q2_d2 "IRFRU1205" TO-252 692.16,1553.96 r180 bottom
Q2_d3 "IRFRU1205" TO-252 692.16,1832.96 r180 bottom
Q3 "9013" SO-G3/Y1 -1969,815.24 r180 top
R1 "300" 0805R -2011,1011 r90 top
R1_11 "100R" 0603 -1955,1369 r0 top
R1_12 "100R" 0603 -1955,1656 r0 top
R1_13 "100R" 0603 -1957,1927 r0 top
R1_21 "100R" 0603 2134,1373 r180 top
R1_22 "100R" 0603 2129,1930 r180 top
R1_23 "100R" 0603 2129,1650 r180 top
R1_31 "100R" 0603 1852,41.94 r90 top
R1_32 "100R" 0603 2400.96,41.94 r90 top
R1_33 "100R" 0603 2125,44.94 r90 top
R1_41 "100R" 0603 -1895,246 r270 top
R1_42 "100R" 0603 -2441,246 r270 top
R1_43 "100R" 0603 -2172,241.15 r270 top
R1_d1 "100R" 0603 729,1409 r180 top
R1_d2 "100R" 0603 730,1683 r180 top
R1_d3 "100R" 0603 729,1965 r180 top
R2 "51k ％1" 0805R -459,-1089 r180 bottom
R2_11 "100R" 0603 -2327,1361 r180 bottom
R2_12 "100R" 0603 -2327.96,1632 r180 bottom
R2_13 "100R" 0603 -2329,1927 r180 bottom
R2_21 "100R" 0603 2503,1375 r0 bottom
R2_22 "100R" 0603 2509,1933 r0 bottom
R2_23 "100R" 0603 2504,1647 r0 bottom
R2_31 "100R" 0603 1852,-323.06 r270 bottom
R2_32 "100R" 0603 2397,-323.06 r270 bottom
R2_33 "100R" 0603 2126,-324.06 r270 bottom
R2_41 "100R" 0603 -1890,606 r90 bottom
R2_42 "100R" 0603 -2439,606 r90 bottom
R2_43 "100R" 0603 -2161,608.24 r90 bottom
R2_d1 "100R" 0603 1104,1407 r0 bottom
R2_d2 "100R" 0603 1105,1678 r0 bottom
R2_d3 "100R" 0603 1109,1964 r0 bottom
R3 "2.2K" 0805R 2114,-701 r0 bottom
R4 "1K" 0805R 2223,-797 r0 bottom
R5 "2.2K" 0805R -1911,1105 r270 top
R6 "510" 0805R 77,2006.96 r180 top
R7 "1K" 0805R -1916,923 r180 top
R8 "30k  ％1" 0805R -547,-1237 r0 bottom
R9 "10K" 0603排阻 -23.8,-1138 r0 bottom
R10 "10K" 0603排阻 19.2,-1335 r0 bottom
R11 "2K" 0603排阻 -740,-1004 r180 top
R12 "10K" 0603排阻 203,-1414 r0 bottom
R13 "22" 0603排阻 -202.8,-1062 r0 bottom
R14 "3.3k" 0805R -1898,-1223 r0 top
R15 "22k" 0805R -1806,-1145 r180 top
R16 "22" 0603排阻 -129,-1147 r180 bottom
R17 "22" 0603排阻 -127,-1317 r180 bottom
R18 "10K" 0603排阻 -656,209 r270 bottom
R19 "22" 0603排阻 1487,921 r90 top
R20 "22" 0603排阻 1285,921 r90 top
R21 "22" 0603排阻 -657,-11.8 r90 top
R22 "22" 0603排阻 -125,47.2 r90 bottom
R23 "22" 0603排阻 -390.8,350 r0 top
R24 "22" 0603排阻 328,-13 r90 top
R25 "22" 0603排阻 326,-245 r90 top
R26 "10K" 0603排阻 -1393,14 r180 top
R29 "22" 0603排阻 -1514,-377 r0 bottom
R30 "22" 0603排阻 1549,205 r0 bottom
R31 "22" 0603排阻 -1402,354 r180 bottom
R32 "22" 0603排阻 -1146,111 r0 top
R33 "22" 0603排阻 -1142.8,246 r0 bottom
R34 "10K" 0603排阻 335,253 r90 top
R35 "1.6K" 0805R -813,-1152 r0 top
R36 "1.6K" 0805R -814.01,-1226.5 r0 top
R37 "22" 0603排阻 311,-860 r270 bottom
R38 "22" 0603排阻 330,-657.8 r90 top
R39 "10K" 0603排阻 329,-491 r90 top
R40 "1K" 0805R -163,-734 r180 top
R41 "22" 0603排阻 -25,343 r0 top
R42 "22" 0805R 810,-1333 r0 top
R43 "10k" 0805R -21,-962 r0 bottom
R44 "10k" 0805R -114,-880.5 r0 bottom
R45 "10k" 0805R -1911,-1306 r0 bottom
R46 "51k ％1" 0805R 1095,-1741 r90 bottom
R47 "510" 0805R -1096.93,-2392 r180 top
R48 "30k  ％1" 0805R 1021,-1648 r270 bottom
R49 "510" 0805R -1380.93,-2384 r180 top
R50 "2K" 0603排阻 413,-934.8 r270 top
R89 "res" 0805 462,-786 r180 top
R90 "res" 0805 291,-787.09 r0 top
R91 "res" 0805 220,-919 r90 top
R92 "470" 0805 -2510.4,-1309 r180 bottom
R93 "1.6K" 0805 -2378,-1171 r90 bottom
R94 "22k" 0805 -2337,-1310 r0 bottom
R95 "10k" 0805 -785,-551 r0 top
R96 "10k" 0805 -785,-636 r0 top
R97 "10k" 0805 -213,-557.83 r0 top
R98 "10k" 0805 -213,-646 r0 top
R99 "10k" 0805 -1823,-832 r180 top
R100 "15K" 0805 -785,-465 r180 top
R101 "15K" 0805 -785,-377.14 r180 top
R102 "15K" 0805 -213,-381.5 r0 top
R103 "15K" 0805 -213,-469.67 r0 top
R104 "15K" 0805 -1821.19,-925 r0 top
R105_1 "res" 0603 -2785,1281 r270 top
R105_2 "res" 0603 2717,1481 r90 top
R105_3 "res" 0603 2323,-450.06 r180 top
R105_4 "res" 0603 -1807.73,-143.9 r90 top
R105_d "res" 0603 885.5,1212 r0 top
R106 "10k" 0805R -2469,-1822 r90 bottom
R107 "10k" 0805R -2469,-1517 r270 bottom
R112 "1K" 0805R -2294,-917 r180 top
R125 "470" 0805R -1287,-988 r90 top
R167 "100" 0805R -963.36,2060.76 r180 bottom
R168 "20K" 0805R 49.8,276 r0 bottom
R182 "10K" 0805R -2294,-696 r180 top
R183 "10K" 0805R -2294,-843 r180 top
R184 "2K" 0805R -2294,-770 r180 top
R190 "10k" 0805R 263,757 r0 bottom
R191 "10k" 0805R 591,799 r180 bottom
R268 "22" 0603排阻 48.8,15 r180 top
R272 "1K" 0805R -2714,-608 r270 top
U1 "TPS79401/501" SOT223-6 -684,-913 r270 bottom
U1_1 "ACS712" SOIC-8 -2501.34,1603 r270 bottom
U1_2 "ACS712" SOIC-8 1504,1556 r270 bottom
U1_3 "ACS712" SOIC-8 2126,634.28 r180 bottom
U1_4 "ACS712" SOIC-8 -2383.04,-359 r0 bottom
U1_11 "IR2103" SOIC-8 -1540.34,1187.36 r90 top
U1_12 "IR2103" SOIC-8 -1540.34,1410 r90 top
U1_13 "IR2103" SOIC-8 -1540.34,1632.64 r90 top
U1_21 "IR2103" SOIC-8 1676.34,1284 r270 top
U1_22 "IR2103" SOIC-8 1676.34,1717 r270 top
U1_23 "IR2103" SOIC-8 1676.34,1499.7 r270 top
U1_31 "IR2103" SOIC-8 1981,477.6 r180 top
U1_32 "IR2103" SOIC-8 2426,475.61 r180 top
U1_33 "IR2103" SOIC-8 2203.36,475.61 r180 top
U1_41 "IR2103" SOIC-8 -2068,-188 r0 top
U1_42 "IR2103" SOIC-8 -2493,-188 r0 top
U1_43 "IR2103" SOIC-8 -2280,-188 r0 top
U1_d "ACS712" SOIC-8 93,1635 r270 bottom
U1_d1 "IR2103" SOIC-8 262,1302.96 r270 top
U1_d2 "IR2103" SOIC-8 262,1519.96 r270 top
U1_d3 "IR2103" SOIC-8 262,1736.96 r270 top
U2 "*" SOP14 516,526.41 r180 top
U3 "nRF2401" HDR2X8 2244,-1141 r180 top locked
U4 "TPS79401/501" SOT223-6 1311,-1519 r180 bottom
U6 "PCA9557PW" TSSOP16 -565,-847.23 r0 top
U7 "*" SOP14 -488,664.77 r0 top
U8 "*" SOP14 784.59,-512 r90 bottom
U9 "*" SOP14 634.05,-876 r90 top
U10 "*" SOP14 -868.5,511.82 r0 bottom
U11 "TLC0834" SO-14 -1660,-1350 r0 bottom
U12 "*" SOP14 780.18,239 r90 bottom
U13 "*" SOP14 -1604.5,514.23 r0 bottom
U14 "*" SOP14 -105.5,518.23 r0 bottom
U15 "*" SOP14 634.05,-1058.5 r270 bottom
U16 "*" SOP14 625.23,-141 r90 top
U17 "PCA9557PW" TSSOP16 -595,-1178.23 r0 top
U18 "LM2576T-5.0" D2PAK1 -1060,1343 r180 bottom
U19 "TL431CLP" SOT89 -1268.63,-1163 r270 top
U20 "MC34152D" SO-G8 814.89,763 r90 bottom
U21 "*" SOP14 -1225.5,667.77 r0 top
U22 "LM339" SOP14 -602,-433.14 r0 top
U23 "TL431CLP" SOT89 -2143.63,-1261 r90 bottom
U51 "LM393" LM393 -1988,-922 r180 top

## Footprints (in the part's own frame and the unit in brackets; to place one, negate y for a bottom-side part, rotate by r counter-clockwise, add the part's x,y. Pads: shape width x height; smd on the part's side, far side on the other; paste and mask are expansions set on the pad)
2*2_2.5mm [mm]
  rect 1.5x1.5 hole 0.9: 1(0,0)
  round 1.5 hole 0.9: 2(0,2.54) 3(2.54,0) 4(2.54,2.54)
  silkscreen extent -2.54,-2.54 5.08,5.08
2*4_2.5mm [mm]
  rect 1.5x1.5 hole 0.9: 1(0,0)
  round 1.5 hole 0.9: 2(0,2.54) 3(2.54,0) 4(2.54,2.54) 5(5.08,0) 6(5.08,2.54) 7(7.62,0) 8(7.62,2.54)
  silkscreen extent -2.54,-2.54 10.16,5.08
0603 [mil]
  rect 38x31 smd: 1(-31.5,0) 2(31.5,0)
  silkscreen extent -60,-25 60,25
0603_diode [mil]
  rect 38x31 smd: 1(-31.5,0) 2(31.5,0)
  silkscreen extent -60,-25 60,25
0603排阻 [mm]
  rect 0.9x0.7 smd: 1(0,0) 2(1.9,0) 7(0,-2.591) 8(1.9,-2.591)
  rect 0.9x0.55 smd: 3(0,-0.889) 4(1.9,-0.889) 5(0,-1.702) 6(1.9,-1.702)
  silkscreen extent -0.76,-3.17 2.67,0.61
0805 [mm]
  rect 1.3x1.5 smd: 1(-0.95,0) 2(0.95,0)
  silkscreen extent -2.03,-1.02 2.03,1.02
0805C [mm]
  rect 1.4x1.3 smd: 1(-0.102,0) 2(2.388,0)
  silkscreen extent -1.22,-0.88 3.49,0.87
0805D [mil] "二?"
  rect 50x50 smd: 1(0,0) 2(80,0)
  silkscreen extent -50,-50 130,50
0805R [mm]
  rect 1.4x1.3 smd: 1(0,0) 2(2.362,0)
  silkscreen extent -0.97,-0.91 3.33,0.91
2512r [mil] "Chip Resistor; Body 6.3 x 3.2 mm (L"
  rect 120x120 smd: 1(0,0) 2(230,0)
  silkscreen extent -80,-75 310,75
A6RV-161RS [mm] "旋转开?"
  rect 1.5x1.5 hole 0.9: 1(0,0)
  round 1.5 hole 0.9: 2(-5.08,-2.54) 3(-2.54,-2.54) 4(0,-2.54) 5(2.54,-2.54)
  silkscreen extent -6.27,-6.1 3.73,1.02
Buzzer [mil]
  round 60 hole 30: 1(0,0) 2(320,0)
  silkscreen extent -80,-240 400,240
"Cap - duplicate1" [mm]
  rect 2.2x4.4 smd: 1(0,0) 2(0,9.398)
  silkscreen extent -5.21,-2.03 5.21,10.29
CONNECTOR_FPGA [mm]
  rect 1.5x1.5 hole 0.9: 1(0,0) 51(-62.103,-68.707)
  round 1.5 hole 0.9: 2(0,-2.54) 3(-2.54,0) 4(-2.54,-2.54) 5(-5.08,0) 6(-5.08,-2.54) 7(-7.62,0) 8(-7.62,-2.54) 9(-10.16,0) 10(-10.16,-2.54) 11(-12.7,0) 12(-12.7,-2.54) 13(-15.24,0) 14(-15.24,-2.54) 15(-17.78,0) 16(-17.78,-2.54) 17(-20.32,0) 18(-20.32,-2.54) 19(-22.86,0) 20(-22.86,-2.54) 21(-25.4,0) 22(-25.4,-2.54) 23(-27.94,0) 24(-27.94,-2.54) 25(-30.48,0) 26(-30.48,-2.54) 27(-33.02,0) 28(-33.02,-2.54) 29(-35.56,0) 30(-35.56,-2.54) 31(-38.1,0) 32(-38.1,-2.54) 33(-40.64,0) 34(-40.64,-2.54) 35(-43.18,0) 36(-43.18,-2.54) 37(-45.72,0) 38(-45.72,-2.54) 39(-48.26,0) 40(-48.26,-2.54) 41(-50.8,0) 42(-50.8,-2.54) 43(-53.34,0) 44(-53.34,-2.54) 45(-55.88,0) 46(-55.88,-2.54) 47(-58.42,0) 48(-58.42,-2.54) 49(-60.96,0) 50(-60.96,-2.54) 52(-62.103,-66.167) 53(-59.563,-68.707) 54(-59.563,-66.167) 73(-34.163,-68.707) 74(-34.163,-66.167) 75(-31.623,-68.707) 76(-31.623,-66.167) 77(-29.083,-68.707) 78(-29.083,-66.167) 79(-26.543,-68.707) 80(-26.543,-66.167) 81(-24.003,-68.707) 82(-24.003,-66.167) 83(-21.463,-68.707) 84(-21.463,-66.167) 85(-18.923,-68.707) 86(-18.923,-66.167) 87(-16.383,-68.707) 88(-16.383,-66.167) 89(-13.843,-68.707) 90(-13.843,-66.167) 91(-11.303,-68.707) 92(-11.303,-66.167) 93(-8.763,-68.707) 94(-8.763,-66.167) 95(-6.223,-68.707) 96(-6.223,-66.167) 97(-3.683,-68.707) 98(-3.683,-66.167) 113(14.91,-52.984) 114(12.37,-52.984) 115(14.91,-50.444) 116(12.37,-50.444) 117(14.91,-47.904) 118(12.37,-47.904) 119(14.91,-45.364) 120(12.37,-45.364) 121(14.91,-42.824) 122(12.37,-42.824) 123(14.91,-40.284) 124(12.37,-40.284) 125(14.91,-37.744) 126(12.37,-37.744) 127(14.91,-35.204) 128(12.37,-35.204) 129(14.91,-32.664) 130(12.37,-32.664) 131(14.91,-30.124) 132(12.37,-30.124) 133(14.91,-27.584) 134(12.37,-27.584) 135(14.91,-25.044) 136(12.37,-25.044) 137(14.91,-22.504) 138(12.37,-22.504) 139(14.91,-19.964) 140(12.37,-19.964) 141(14.91,-17.424) 142(12.37,-17.424) 143(14.91,-14.884) 144(12.37,-14.884) 145(14.91,-12.344) 146(12.37,-12.344) 147(14.91,-9.804) 148(12.37,-9.804) 149(14.91,-7.264) 150(12.37,-7.264)
  silkscreen extent -72.01,-71.88 17.91,22.99
D2PAK1 [mm]
  rect 1.05x2.1 smd: 1(-3.4,-4.225) 2(-1.7,-4.225) 3(0,-4.225) 4(1.7,-4.225) 5(3.4,-4.225)
  rect 10.5x12.3 smd: 6(0,5.766)
  silkscreen extent -5.55,-5.17 5.56,11.83
FUSE [mil]
  rect 70x80 smd: 1(0,0) 2(0,-140)
  silkscreen extent -60,-195 60,55
HDR1X8 [mm]
  rect 1.5x1.5 hole 0.9: 1(0,0)
  round 1.5 hole 0.9: 2(2.54,0) 3(5.08,0) 4(7.62,0) 5(10.16,0) 6(12.7,0) 7(15.24,0) 8(17.78,0)
  silkscreen extent -1.27,-1.27 19.05,1.27
HDR2X4 [mm] "Connector; Header; 4x2 Position"
  rect 1.5x1.5 hole 0.9: 1(0,0)
  round 1.5 hole 0.9: 2(0,2.54) 3(2.54,0) 4(2.54,2.54) 5(5.08,0) 6(5.08,2.54) 7(7.62,0) 8(7.62,2.54)
  silkscreen extent -1.27,-1.27 8.89,3.81
HDR2X8 [mm]
  rect 1.5x1.5 hole 0.9: 1(0,0)
  round 1.5 hole 0.9: 2(0,2.54) 3(2.54,0) 4(2.54,2.54) 5(5.08,0) 6(5.08,2.54) 7(7.62,0) 8(7.62,2.54) 9(10.16,0) 10(10.16,2.54) 11(12.7,0) 12(12.7,2.54) 13(15.24,0) 14(15.24,2.54) 15(17.78,0) 16(17.78,2.54)
  silkscreen extent -1.27,-1.27 19.05,3.81
Header_8P [mil] "Used for Motor connecter in ZJUNlict"
  rect 60x60 hole 30: 1(0,0)
  round 60 hole 30: 2(0,100) 3(0,200) 4(0,300) 5(0,400) 6(0,500) 7(0,600) 8(0,700)
  silkscreen extent -510,-70 80,770
J10 [mm]
  rect 4.4x2.2 smd: 1(0,0) 2(9.398,0)
  silkscreen extent -0.64,-5.21 10.16,5.21
L [mil]
  rect 170x220 smd: 1(-190,-72.5) 2(260,-77.5)
  silkscreen extent -305,-308 365,163
LM393 [mm]
  rect 2.2x0.6 smd: 1(0,0) 2(0,-1.27) 3(0,-2.54) 4(0,-3.81) 5(5.2,-3.81) 6(5.2,-2.54) 7(5.2,-1.27) 8(5.2,0)
  silkscreen extent -0.12,-4.4 3.7,0.97
SMC [mm]
  rect 3x4 smd: 1(0,0) 2(6.096,0)
  silkscreen extent -1.78,-2.92 8.13,2.92
SMD-2P-1.25 [mm]
  rect 0.762x2.032 smd: 1(0,0) 2(1.25,0)
  rect 3x2.25 smd: ""(-2.7,-3.5) ""(3.95,-3.5)
  silkscreen extent -4.45,-6.73 5.71,-1.27
SMD-3P-1.25 [mm]
  rect 0.762x2.032 smd: 1(0,0) 2(1.25,0) 3(2.5,0)
  rect 3x2.25 smd: ""(-2.7,-3.5) ""(5.2,-3.5)
  silkscreen extent -4.44,-6.73 6.98,-1.27
SMD-5P-1.25 [mm]
  rect 0.762x2.032 smd: 1(0,0) 2(1.25,0) 3(2.5,0) 4(3.75,0) 5(5,0)
  rect 3x2.25 smd: ""(-2.7,-3.5) ""(7.7,-3.5)
  silkscreen extent -4.44,-6.73 9.53,-1.27
SO-14 [mil]
  oval 80x24 smd: 1(0,0) 2(0,-50) 3(0,-100) 4(0,-150) 5(0,-200) 6(0,-250) 7(0,-300) 8(220,-300) 9(220,-250) 10(220,-200) 11(220,-150) 12(220,-100) 13(220,-50) 14(220,0)
  silkscreen extent 60,-325 160,25
SO-G3/Y1 [mm]
  rect 0.85x1 smd: 1(-1.331,-0.692) 2(0.569,-0.692) 3(-0.381,1.708)
  silkscreen extent -2.43,-0.82 0.89,1.71
SO-G8 [mm]
  rect 0.6x2.2 smd: 1(-1.905,-2.6) 2(-0.635,-2.6) 3(0.635,-2.6) 4(1.905,-2.6) 5(1.905,2.6) 6(0.635,2.6) 7(-0.635,2.6) 8(-1.905,2.6)
  silkscreen extent -2.88,-2.72 2.5,1.1
"SOD-123 - duplicate" [mm]
  rect 1.6x0.8 smd: A(0,0) K(3.4,0)
  silkscreen extent -1.25,-0.85 4.65,0.85
SOIC-8 [mm]
  rect 0.7x2.1 smd: 1(0,0)
  oval 0.7x2.1 smd: 2(1.27,0) 3(2.54,0) 4(3.81,0) 5(3.81,5.3) 6(2.54,5.3) 7(1.27,5.3) 8(0,5.3)
  silkscreen extent -1.02,-0.13 4.41,3.85
SOP14 [mm]
  rect 1.65x0.3 smd: 1(-0.127,0) 2(-0.127,-0.65) 3(-0.127,-1.3) 4(-0.127,-1.95) 5(-0.127,-2.6) 6(-0.127,-3.25) 7(-0.127,-3.9) 8(5.677,-3.9) 9(5.677,-3.25) 10(5.677,-2.6) 11(5.677,-1.95) 12(5.677,-1.3) 13(5.677,-0.65) 14(5.677,0)
  silkscreen extent -0.13,-4.19 4.33,0.82
SOT89 [mm] "SOT-89; Body 4.6 x 4.25 mm, inc. leads (LxW max)"
  rect 0.7x1.35 smd: 1(-1.5,-1.388) 2(0,-1.388) 3(1.5,-1.388)
  oct 1.9x3.3 smd: 4(0,1.388)
  silkscreen extent -3.27,-2.51 2.5,3.49
SOT223-6 [mm]
  rect 0.51x2.15 smd: 1(0,0) 2(1.27,0) 3(2.54,0) 4(3.81,0) 5(5.08,0)
  rect 3.5x2.15 smd: 6(2.54,6.223)
  silkscreen extent -1.05,-1.75 5.99,4.72
TO-252 [mm] "FOR MURD620CTG"
  rect 1.6x1 smd: 1(-10.537,5.46) 3(-10.537,0.89)
  rect 7.1x5.5 smd: 2(-3.687,3.175)
  silkscreen extent -11.56,0 0,6.35
TSSOP16 [mm]
  rect 1.65x0.3 smd: 1(0,0) 2(0,-0.65) 3(0,-1.3) 4(0,-1.95) 5(0,-2.6) 6(0,-3.25) 7(0,-3.9) 8(0,-4.55) 9(5.55,-4.55) 10(5.55,-3.9) 11(5.55,-3.25) 12(5.55,-2.6) 13(5.55,-1.95) 14(5.55,-1.3) 15(5.55,-0.65) 16(5.55,0)
  silkscreen extent -0.12,-4.82 4.33,0.82
安装孔-3.5-5 [mm]
  round 5 hole 3.5: 1(0,0)
  silkscreen extent -2.7,-2.7 2.7,2.7

## Part data
C1 C5 C6 C7 C40 C56 C67 C68 C69: library part CAP, "Capacitor"
C1_11 C1_12 C1_13 C1_21 C1_22 C1_23 C1_31 C1_32 C1_33 C1_41 C1_42 C1_43 C1_d1 C1_d2 C1_d3 C2_11 C2_12 C2_13 C2_21 C2_22 C2_23 C2_31 C2_32 C2_33 C2_41 C2_42 C2_43 C2_d1 C2_d2 C2_d3 C3_11 C3_12 C3_13 C3_21 C3_22 C3_23 C3_31 C3_32 C3_33 C3_41 C3_42 C3_43 C3_d1 C3_d2 C3_d3 C75 C76 C77 C78_1 C78_2 C78_3 C78_4 C78_d C79_1 C79_2 C79_3 C79_4 C79_d C80_1 C80_2 C80_3 C80_4 C80_d C81_1 C81_2 C81_3 C81_4 C81_d: library part cap
C2 C51: library part Cap2, "25V 470uf 10*10", Published=23-Sep-2002, Publisher="Altium Limited"
C3 C18 C19 C20 C21 C22 C23 C24 C25 C26 C27 C28 C29 C30 C31 C32 C33 C34 C36 C37 C38 C39 C41 C44 C45 C46 C47 C50 C52 C53 C54 C55 C57 C58 C59 C60 C61 C62 C63 C64 C65 C66: library part Cap, "Capacitor", LatestRevisionDate=17-Jul-2002, LatestRevisionNote="Re-released for DXP Platform.", Published=8-Jun-2000, Publisher="Altium Limited"
C4: library part Cap2, "Capacitor", Published=23-Sep-2002, Publisher="Altium Limited"
C14 C15 C16 C17 C43 C49: library part Cap, "Capacitor", Manufacturer="Generic Components", Class=Passive, Published=08/06/2000, Publisher="Altium Hobart Technology Centre", SubClass=Capacitor
C70 C71 C72 C73 C74: library part cap-pol
D1 D4: library part Diode, "Default Diode", Manufacturer="Generic Components", Class=Discrete, Published=08/06/2000, Publisher="Altium Hobart Technology Centre", SubClass="Diode - Switching"
D1_11 D1_12 D1_13 D1_21 D1_22 D1_23 D1_31 D1_32 D1_33 D1_41 D1_42 D1_43 D1_d1 D1_d2 D1_d3: library part diode
DS1 DS4: "Typical RED, GREEN, YELLOW, AMBER GaAs LED", Manufacturer="Generic Components", Class=Optoelectronic, Published=08/06/2000, Publisher="Altium Hobart Technology Centre", SubClass=LED
DS2 DS3: "Typical RED, GREEN, YELLOW, AMBER GaAs LED", LatestRevisionDate=17-Jul-2002, LatestRevisionNote="Re-released for DXP Platform.", Published=8-Jun-2000, Publisher="Altium Limited"
F1: library part Res1, "Resistor", LatestRevisionDate=17-Jul-2002, LatestRevisionNote="Re-released for DXP Platform.", Published=8-Jun-2000, Publisher="Altium Limited"
JP1: "Header, 3-Pin", LatestRevisionDate=17-Jul-2002, LatestRevisionNote="Re-released for DXP Platform.", Publisher="Altium Limited"
JP2: "Header, 2-Pin", LatestRevisionDate=17-Jul-2002, LatestRevisionNote="Re-released for DXP Platform.", Publisher="Altium Limited"
JP51 P14 P25: "Header, 4-Pin, Dual row", LatestRevisionDate=17-Jul-2002, LatestRevisionNote="Re-released for DXP Platform.", Publisher="Altium Limited"
JP52: "Header, 2-Pin, Dual row", LatestRevisionDate=17-Jul-2002, LatestRevisionNote="Re-released for DXP Platform.", Publisher="Altium Limited"
JP53 JP54: library part header1*8*2.54, "HEADER1*8  2.54"
L1 LS1: Manufacturer="Generic Components"
  L1: Class=Passive, Published=08/06/2000, Publisher="Altium Hobart Technology Centre", SubClass=Inductor
  LS1: Published=1999
P1 P2 P3 P4: "Header, 5-Pin", LatestRevisionDate=17-Jul-2002, LatestRevisionNote="Re-released for DXP Platform.", Publisher="Altium Limited"
P5 P7 P11: "RF Coaxial PCB Connector, MMCX; Thru-Hole, Vertical Mount Plug,  50 Ohm Impedance", PackageDocument="Rev. A, 16-Jun-1997", ComponentLink1Description="Manufacturer Link", ComponentLink1URL=http://www.amphenolrf.com/, DatasheetDocument=30-May-2003, DrillSize="Corresponds to nominal value.", LatestRevisionDate=15-Jul-2004, LatestRevisionNote="Component Replaced.", PackageReference=908-21103, PCB_Layout="Complies with manufacturer's recommendation.", Published=15-Jul-2004, Publisher="Altium Limited"
P5d P51 P52 P53 P54: "Used for Motor connection in ZJUNlict"
P15 P16 P17 P18 P19 P20: library part Plug, "Plug", LatestRevisionDate=17-Jul-2002, LatestRevisionNote="Re-released for DXP Platform.", Publisher="Altium Limited"
Q2 Q3: library part BC817-40, "NPN General Purpose Amplifier", Manufacturer="Fairchild Semiconductor", Class=Discrete, Published=8/06/2000, Publisher="Altium Hobart Technology Centre", Revised="11-July-2000: SIM Model Added.", SubClass="BJT - Low Power"
R1 R3 R4 R5 R6 R7 R14 R15 R35 R36 R40 R42 R47 R49 R112 R125 R167 R168 R182 R183 R184 R272: library part Res1, "Resistor", Manufacturer="Generic Components", Class=Passive, Published=08/06/2000, Publisher="Altium Hobart Technology Centre", SubClass=Resistor
R1_11 R1_12 R1_13 R1_21 R1_22 R1_23 R1_31 R1_32 R1_33 R1_41 R1_42 R1_43 R1_d1 R1_d2 R1_d3 R2_11 R2_12 R2_13 R2_21 R2_22 R2_23 R2_31 R2_32 R2_33 R2_41 R2_42 R2_43 R2_d1 R2_d2 R2_d3 R92 R93 R94 R95 R96 R97 R98 R99 R100 R101 R102 R103 R104: library part res
R2 R8 R46 R48: library part RES
R9 R10 R11 R12 R13 R16 R17 R18 R19 R20 R21 R22 R23 R24 R25 R26 R29 R30 R31 R32 R33 R34 R37 R38 R39 R41 R50 R268: library part 0805排阻
  R9 R10 R12 R13 R16 R17 R18 R19 R20 R21 R22 R23 R24 R25 R26 R29 R30 R31 R32 R33 R34 R37 R38 R39 R41 R268: =22
  R11 R50: =2K
R43 R44 R45 R106 R107 R190 R191: library part SR0805, "Resistance"
U1 U4: library part TPS79401
U2 U7 U8 U9 U10 U12 U13 U14 U15 U16 U21: library part SN74HC14D, "Hex Schmitt-Trigger Inverter", Code_IPC=SOIC127P600-14, ComponentLink1Description="Manufacturer Link", ComponentLink1URL=http://www.ti.com/, ComponentLink2Description=Datasheet, ComponentLink2URL=http://www-s.ti.com/sc/ds/sn74hc14.pdf, DatasheetVersion=May-1997, LatestRevisionDate=13-Apr-2006, LatestRevisionNote="IPC-7351 Footprint Added.", PackageDescription="14-Pin Small Outline Integrated Circuit 1.27 mm Pitch", PackageReference=D014, PackageVersion=Jan-1998, Published=8-Jun-2000, Publisher="Altium Limited"
  U2 U9 U10 U16 U21: 74HC14=74HC14
  U7 U8 U12 U13 U14 U15: 74LVC14A=74LVC14A
U3: "2.4G, wireless"
U11: "8bit 4 channel , A to D"
U18: library part LM2575T-5.0, "Simple Switcher 1A Step Down Voltage Regulator", Manufacturer="National Semiconductor", Class="Power Management", Note="Tab is connected to GND", Published=15/04/2002, Publisher="Altium Hobart Technology Centre", SubClass="Switching Regulator"
U19 U23: "Programmable Precision Reference", Manufacturer="ON Semiconductor", Class="Power Management", Published=15/04/2002, Publisher="Altium Hobart Technology Centre", SubClass="Voltage Reference"
U20: "High Speed Dual MOSFET Driver", Manufacturer=Motorola, Class=Interface, Published=15/04/2002, Publisher="Altium Hobart Technology Centre", SubClass="MOSFET Driver"

## Via types
v1: diameter 18, hole 10, Top Layer to Bottom Layer, 606 vias
v2: diameter 25, hole 12, Top Layer to Bottom Layer, 77 vias
v3: diameter 15, hole 10, Top Layer to Bottom Layer, 44 vias
v4: diameter 20, hole 12, Top Layer to Bottom Layer, 43 vias
v5: diameter 50, hole 30, Top Layer to Bottom Layer, 28 vias
v6: diameter 30, hole 20, Top Layer to Bottom Layer, 1 vias
v7: diameter 40, hole 25, Top Layer to Bottom Layer, 1 vias
v8: diameter 30, hole 16, Top Layer to Bottom Layer, 1 vias

## Nets (pads, with @x,y where several pads share a name; then routed paths per layer and width w, separated by ;. In a path a pad name is that pad's centre, name@x,y a point inside that pad or via, vN(x,y) a via of type N, cw(c..) or ccw(c..) an arc to the next point about the centre after c; other vN are vias at no path point)
3.3V: C7.1 C24.2 C25.2 C30.2 C31.2 C32.2 C34.2 C40.1 R2.1 R6.1 U1.4 U7.14 U8.14 U12.14 U13.14 U14.14 U15.14 | length 4515.1
  Top Layer w10: v1(-43,450) -43,453 20,516 v3(18,518) ; v3(634.05,-1223.05) 694,-1283 C24.2@694,-1348 ; v1(780,514) 805.64,514 842,477.64 C31.2@842,493
  Top Layer w15: v3(-409.22,734) -409.22,1075.37 -517,1183.15 -517,1821 -421,1917 -305,1917 -272,1950 -272,2045 -231.12,2085.88 57.12,2085.88 77,2066 v1(77,2006.96) ; U7.14@-264.5,668 v3(-264.5,691.59) ; v1(573.59,155) 617.59,199 v1(829,199) ; v3(670,-219) 712.5,-261.5 829.5,-261.5 v3(831,-260) ; v1(842,280) C31.2@842,477.64
  Bottom Layer w10: v3(831,-260) 854,-283 v1(976,-283)
  Bottom Layer w15: v3(-1481.53,514.23) U13.14@-1381,514.23 ; v3@-409,516 v3(-409.22,516.22) v3(-409.22,734) -366.81,691.59 v3(-264.5,691.59) ; v3(18,518) 117.77,518 U14.14@118,518.23 U14.14@121.5,518.23 ; U15.14@634.05,-1282 v3(634.05,-1223.05) ; v1(780,514) 780.18,513.82 U12.14@780.18,462.5 ; U8.14@784.59,-288.5 784.59,-262.41 787,-260 799.77,-260 801.27,-261.5 829.5,-261.5 v3(831,-260) ; v1(829,199) 842,212 v1(842,280)
  Bottom Layer w20: U1.4@-684,-1063 -627,-1063 C40.1@-552,-988 -552,-996 R2.1@-459,-1089 -451,-1097 C7.1@-451,-1162
  Bottom Layer w30: R2.1@-459,-1089 v6(-303,-1089)
  other v1: -1305,-195
3.3V_2401: C68.1 C69.1 R46.1 U3.15 U3.16 U4.4 | length 1144.1
  Top Layer w20: v4(1399,-1243) 1542,-1243 U3.16@1544,-1241
  Bottom Layer w20: R46.1@1095,-1741 1164,-1741 C68.1@1167,-1744 1174,-1744 C69.1@1270,-1648 1209,-1587 1161,-1587 U4.4@1161,-1519 1161,-1442 1197,-1406 1377,-1406 1399,-1384 v4(1399,-1243) ; U3.16@1543,-1239 U3.15@1543,-1139
+3.3V: C4.1 C5.1 C36.2 C37.2 C38.2 C39.2 C41.2 DS2.1 DS3.1 JP53.1 JP53.2 JP54.1 P10.52 P25.7 R9.2 R9.4 R9.6 R9.8 R10.2 R10.4 R10.6 R10.8 R11.2 R11.4 R11.6 R11.8 R12.2 R12.4 R35.1 R36.1 R40.2 R43.2 R44.2 R106.1 R107.1 U6.16 U17.16 | length 4934.6
  Top Layer w10: C39.2@-901,-1310 -819.01,-1310 v4(-814.01,-1304.99) ; v4(-299,-800) -277,-800 C38.2@-252,-825
  Top Layer w15: P10.52@-1823.34,-1591 P10.52@-1810.19,-1577.85 ; R11.8@-814.8,-902 -814.8,-877.8 -671,-734 -452,-734 ; v4(-814.01,-1304.99) -814.01,-1996.99 -798,-2013 v4(-673,-2013) ; -450.5,-1096.5 -450.5,-735.5 -452,-734 ; R40.2@-256,-734 -452,-734
  Top Layer w20: v4(-1382.93,-2562) DS2.1@-1382.93,-2476 ; v4(-1096.93,-2564) DS3.1@-1096.93,-2481 ; R11.8@-814.8,-902 R11.6@-814.8,-937 R11.4@-814.8,-969 R11.2@-814.8,-1004 -814.8,-1225.7 R36.1@-814.01,-1226.5 v4(-814.01,-1304.99) ; -450.5,-1096.5 -376.5,-1096.5 U17.16@-376.5,-1174 ; -338.75,-839.48 -256,-756.73 R40.2@-256,-734
  Bottom Layer w10: JP53.2@-2274,-1590 -2196,-1590 C41.2@-2191,-1595 ; C36.2@-1812,-1485 -1812,-1576.04 P10.52@-1810.19,-1577.85 ; R44.2@-21,-880.5 -9.5,-880.5 R43.2@72,-962 72,-1015 R9.8@51,-1036 R9.6@51,-1071 R9.4@51,-1103 R9.2@51,-1138 ; R10.2@92,-1343 R10.4@92,-1300 ; R10.4@94,-1300 R10.6@94,-1268 R10.8@94,-1233 ; R12.2@277.8,-1414 R12.4@277.8,-1379 ; 335,-1379 345.81,-1368.19 C37.2@413.17,-1368.19
  Bottom Layer w15: JP53.2@-2274,-1590 JP53.1@-2274,-1490 ; v4(-299,-800) -44.77,-800 -21,-823.77 R44.2@-21,-880.5 ; 51,-1190 298,-1190 335,-1227 335,-1379
  Bottom Layer w20: v1(-2469,-1894) R106.1@-2469,-1822 ; R107.1@-2469,-1517 v1(-2469,-1450) v1@-2469,-1448 ; v4(-673,-2013) C5.1@-537,-2013 ; R9.2@51,-1138 51,-1190 R10.8@94,-1233 ; R12.4@277.8,-1379 335,-1379
+3.3V1: P10.148
+5V: C1.1 C6.1 C15.2 C19.2 C20.2 C21.2 C22.2 C23.2 C26.2 C27.2 C28.2 C33.2 C43.2 C45.2 C46.2 C50.2 C56.1 C67.1 C81_1.2 C81_2.2 C81_3.2 C81_4.2 C81_d.2 F1.2 LS1.1 P1.4 P2.4 P3.4 P4.4 P5d.4 P14.1 P51.3 P52.3 P53.3 P54.3 R1.2 R18.2 R18.4 R26.2 R26.4 R26.6 R26.8 R34.1 R34.3 R34.5 R34.7 R39.2 R39.4 R39.6 R39.8 R50.3 R50.5 R50.7 R89.1 R90.1 R91.1 R92.2 R100.2 R101.2 R102.2 R103.2 R104.2 R112.2 R125.2 R167.2 R168.2 R183.2 U1.1 U1.2 U1_1.8 U1_2.8 U1_3.8 U1_4.8 U1_d.8 U2.14 U4.1 U4.2 U9.14 U10.14 U11.14 U16.14 U21.14 U22.3 U51.8 | length 19968.6
  Top Layer w10: R103.2@-175.6,-469.67 R102.2@-175.6,-381.5
  Top Layer w15: R26.2@-1467.8,14 R26.4@-1467.8,49 R26.6@-1467.8,81 R26.8@-1467.8,116 -1439.32,144.48 -1439.32,378.68 -1388.5,429.5 -1388.5,734 v3(-1389.5,735) v3(-1389.5,774) ; U22.3@-607,-484.32 v4(-533.32,-484.32)
  Top Layer w20: v1(-2821.79,-1360.21) P4.4@-2651.5,-1360.21 ; v1(-2808.76,861.91) P1.4@-2643,861.91 ; v1(-2805,-548) v1(-2768,-548) -2600,-548 -2564.5,-512.5 v1(-2443.04,-512.5) ; v1(-2699,-843) v1(-2670,-843) R183.2@-2387,-843 R112.2@-2387,-917 -2387,-991 -2352,-1026 -2244,-1026 -2199,-981 ; U51.8@-2192.72,-922 -2192.72,-974.72 -2199,-981 ; v1(-2164,1137) -2166,1137 -2133,1104 R1.2@-2011,1104 ; v1(-2023.83,-1486.83) -1951,-1414 v4(-1758,-1414) ; v4(-1688,-925) R104.2@-1783.79,-925 -1783.79,-929.36 -1835.43,-981 -2199,-981 ; v4(-1360,-895) R125.2@-1287,-895 ; v1(-1045,696) v1(-1034,685) U21.14@-1021,672 ; R100.2@-822.4,-465 R101.2@-822.4,-377.14 -822.4,-344.4 -771,-293 -452,-293 ; v4(-617.18,484) v1(-617.18,745.18) ; v4(-533.32,-484.32) -533.32,-374.32 -452,-293 ; F1.2@-497,2024 v1(-323,2024) ; R102.2@-175.6,-381.5 v4(-72.5,-381.5) -161,-293 -452,-293 ; R90.1@253.6,-787.09 192.58,-787.09 154,-825.67 154,-942 168.4,-956.4 R91.1@220,-956.4 250.6,-956.4 272.2,-934.8 R50.7@311,-934.8 R50.5@346,-934.8 357,-934.8 499.4,-792.4 R89.1@499.4,-786 v4(580,-786) ; 270,519 v4(270,498) 270,409.8 303,376.8 303,256 v4(300,253) R34.1@335,253 R34.3@370,253 R34.5@402,253 R34.7@437,253 ; v4(329,-366) R39.2@329,-416.2 R39.4@364,-416.2 R39.6@396,-416.2 R39.8@431,-416.2 ; v4(595,112.73) 617.87,89.87 ; v4(605,-629) 610.55,-629 625.55,-644 ; v1(1722.85,1927) P52.3@1766.27,1883.58 ; P2.4@2633,957.43 v1(2758.81,957.43) v1@2759.81,957.43 ; P3.4@2635.2,-1276.06 v1(2833.06,-1276.06)
  Top Layer w40: v1(1401,-1518) v1(2666,-1518) v1(2689,-1518) ; v1@1616,-551 v1(1616,-583) v1(1616,-649) 1616,-660 1631,-675 1919,-675 2059,-815 v1(2673,-815) v1(2713,-815)
  Bottom Layer w10: U1_1.8@-2710,1603 -2636.71,1603 -2617.5,1622.21 C81_1.2@-2617.5,1669 ; C23.2@-2558,-1392 C23.2@-2547.8,-1381.8 ; C43.2@-2531.53,1887.47 v1(-2478,1941) ; v1(-2443.04,-512.5) -2387.88,-567.66 U1_4.8@-2383.04,-567.66 ; v4(-1688,-925) -1639,-876 C33.2@-1639,-850 ; C21.2@-1428,816 -1428,812.5 v3(-1389.5,774) ; C27.2@-714,-802 -680,-836 U1.1@-680,-908 ; U1_d.8@-115.66,1635 -70,1680.66 C81_d.2@-70,1695 ; U1_2.8@1295.34,1556 1344.84,1605.5 C81_2.2@1344.84,1629.64 ; U1_3.8@2126,824.44 U1_3.8@2126,842.94 ; U1_3.8@2126,860.94 C81_3.2@2188,798.94
  Bottom Layer w20: v1(-2831,1575) v1(-2817,1589) -2803,1603 U1_1.8@-2710,1603 ; v1(-2821.79,-1360.21) -2550,-1360.21 ; v1(-2707,-1702) v1(-2683,-1726) -2542,-1867 -2542,-1968 -2445,-2065 -2343,-2065 -2317,-2039 -2088.05,-2039 P14.1@-2023.83,-2103.22 v1(-2023.83,-1486.83) ; v1(-2706,1097) -2649,1154 -2181,1154 v1(-2164,1137) ; C23.2@-2547.8,-1381.8 R92.2@-2547.8,-1309 ; v4(-1758,-1414) -1504,-1414 U11.14@-1440,-1350 ; v4(-1688,-925) -1390,-925 v4(-1360,-895) ; v1(-1150.2,2060.76) R167.2@-1056.36,2060.76 ; U1.2@-684,-963 U1.1@-684,-913 -559,-913 -557,-911 C6.1@-557,-841 -557,-508 v4(-533.32,-484.32) ; -637.09,503.91 v4(-617.18,484) -688.7,412.48 -688.7,154.7 -668.2,134.2 R18.2@-656,134.2 R18.4@-621,134.2 ; v1(-336,2030) -336,1741 -230,1635 U1_d.8@-115.66,1635 ; v4(-72.5,-381.5) 313.5,-381.5 v4(329,-366) 429.59,-366 464.59,-401 795,-401 v4(796,-400) ; R168.2@142.8,276 269,276 292,253 v4(300,253) ; v4(270,498) 270,674 v4(309,713) ; v4(580,-786) 586,-786 620.15,-751.85 v4(805,-751.85) ; v4(595,112.73) 611.73,96 v4(819,96) ; v4(605,-629) v4(821,-629) ; v1(1187,1901) 1187,1896.38 1230,1853.38 1230,1596 1270,1556 U1_2.8@1295.34,1556 ; U4.1@1311,-1519 1312.59,-1520.59 1312.59,-1618.91 C56.1@1342.18,-1648.5 C67.1@1415.98,-1648.5 ; LS1.1@1876,-532 2251,-532 C19.2@2419,-700 v1(2663,-700) v1(2693,-700) ; U1_3.8@2126,842.94 2126,860.94 2126,903 2447,903 2632,718 v1(2867.03,718) ; v1(2758.81,957.43) 2810.57,957.43 C28.2@2821,947
  Bottom Layer w40: U4.2@1261,-1519 U4.1@1311,-1519 v1@1401,-1519
  other v1: -2795,-1359 2773,-1278 2797,-1278 896.91,-1043.72 1617,-615 1617,-551 931,376 -2762,862 1211,1879 1192,1884 1725,1915 1735.5,1924 -353,2019 -1129,2061
+5V1: C2.1 C3.2 C51.1 F1.1 L1.2 P10.1 P10.149 U18.4 | length 4697.4
  Top Layer w10: C3.2@-886,2028 -882,2024 F1.1@-727,2024
  Top Layer w30: C51.1@-701,1713 -602,1812 v2(-604,1812) ; v2@-416,1813 v2(-266,1813) ; v2(24,1786) -85,1677 -85,1300 69,1146 186,1146 229,1103 597,1103 634.81,1065.19 P10.1@634.81,1027.15 681.96,980 v2(1083,980)
  Top Layer w40: L1.2@-1051.5,1695 -719,1695 C51.1@-701,1713 ; v5(-835,1287) -710,1287 C2.1@-697,1300 -701,1304 C51.1@-701,1713 ; F1.1@-727,2024 -701,1998 C51.1@-701,1713
  Bottom Layer w30: v2(-604,1812) v2(-415,1812) ; v2(-266,1813) -3,1813 v2(24,1786) ; v2(1083,980) 1221.81,841.19 P10.149@1221.81,741.15
  Bottom Layer w40: U18.4@-1126.93,1176.66 -1126.93,1225.93 -1065.86,1287 v5(-835,1287)
+16V1: C47.1 D1.1 JP51.8 R15.2 U20.6 | length 3335.4
  Top Layer w20: v3(-2061,-1089) -2005,-1145 R15.2@-1899,-1145 ; v3(-1755,671) v3(-1755,774) ; v1(618,1154) v1(650,1154) 707,1154 764,1097 v1(764,1029)
  Bottom Layer w20: -2071,785 -1766,785 v3(-1755,774) ; v3(-2061,-1089) -2069,-1081 -2069,-702 -1820,-453 -1820,-259 -1673,-112 -1673,494.71 -1707.18,528.89 -1707.18,529.71 -1755,577.53 v3(-1755,671) ; v1(764,1029) 764,957 C47.1@812,909 812,812 836,788 U20.6@917.25,788
  Bottom Layer w40: v8(-573,1149) -536.08,1149 D1.1@-438,1247.08
  other v1: -2059.16,784 -2021,784